# Altium PCB SysUprTestUUConn.PcbDoc
Units mm, origin at the board's own origin, x right, y up, seen from the top; angles counter-clockwise.
Board outline 140 x 110 mm, 4 copper layers (Top Layer, Mid-Layer 1, Mid-Layer 2, Bottom Layer), stack 1.572 mm thick; 15 components, 59 nets, 288 pads, 141 vias.
Unrouted connection lines stored in the file: 33.
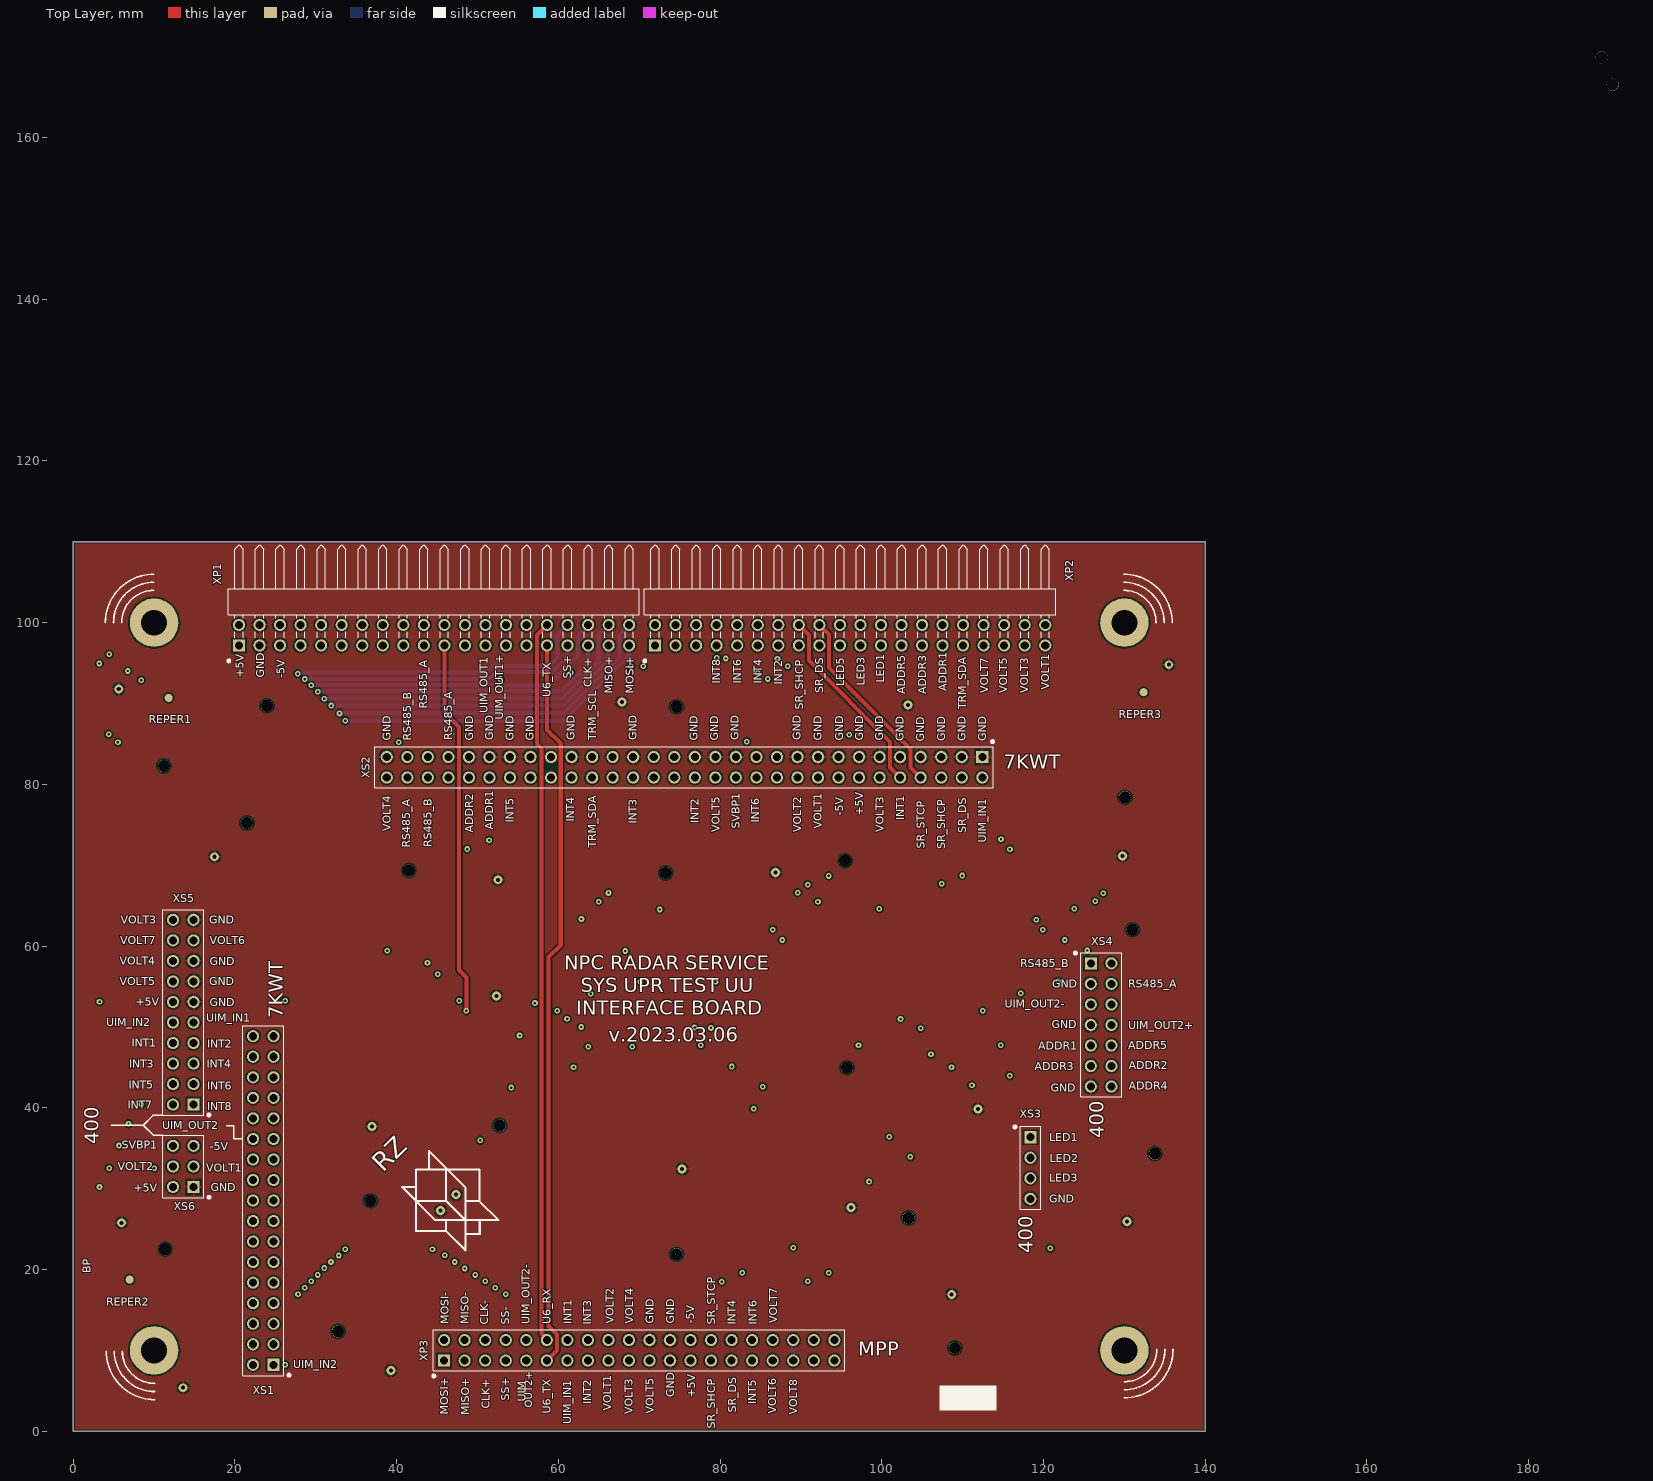
[diagram p0: Top Layer view]
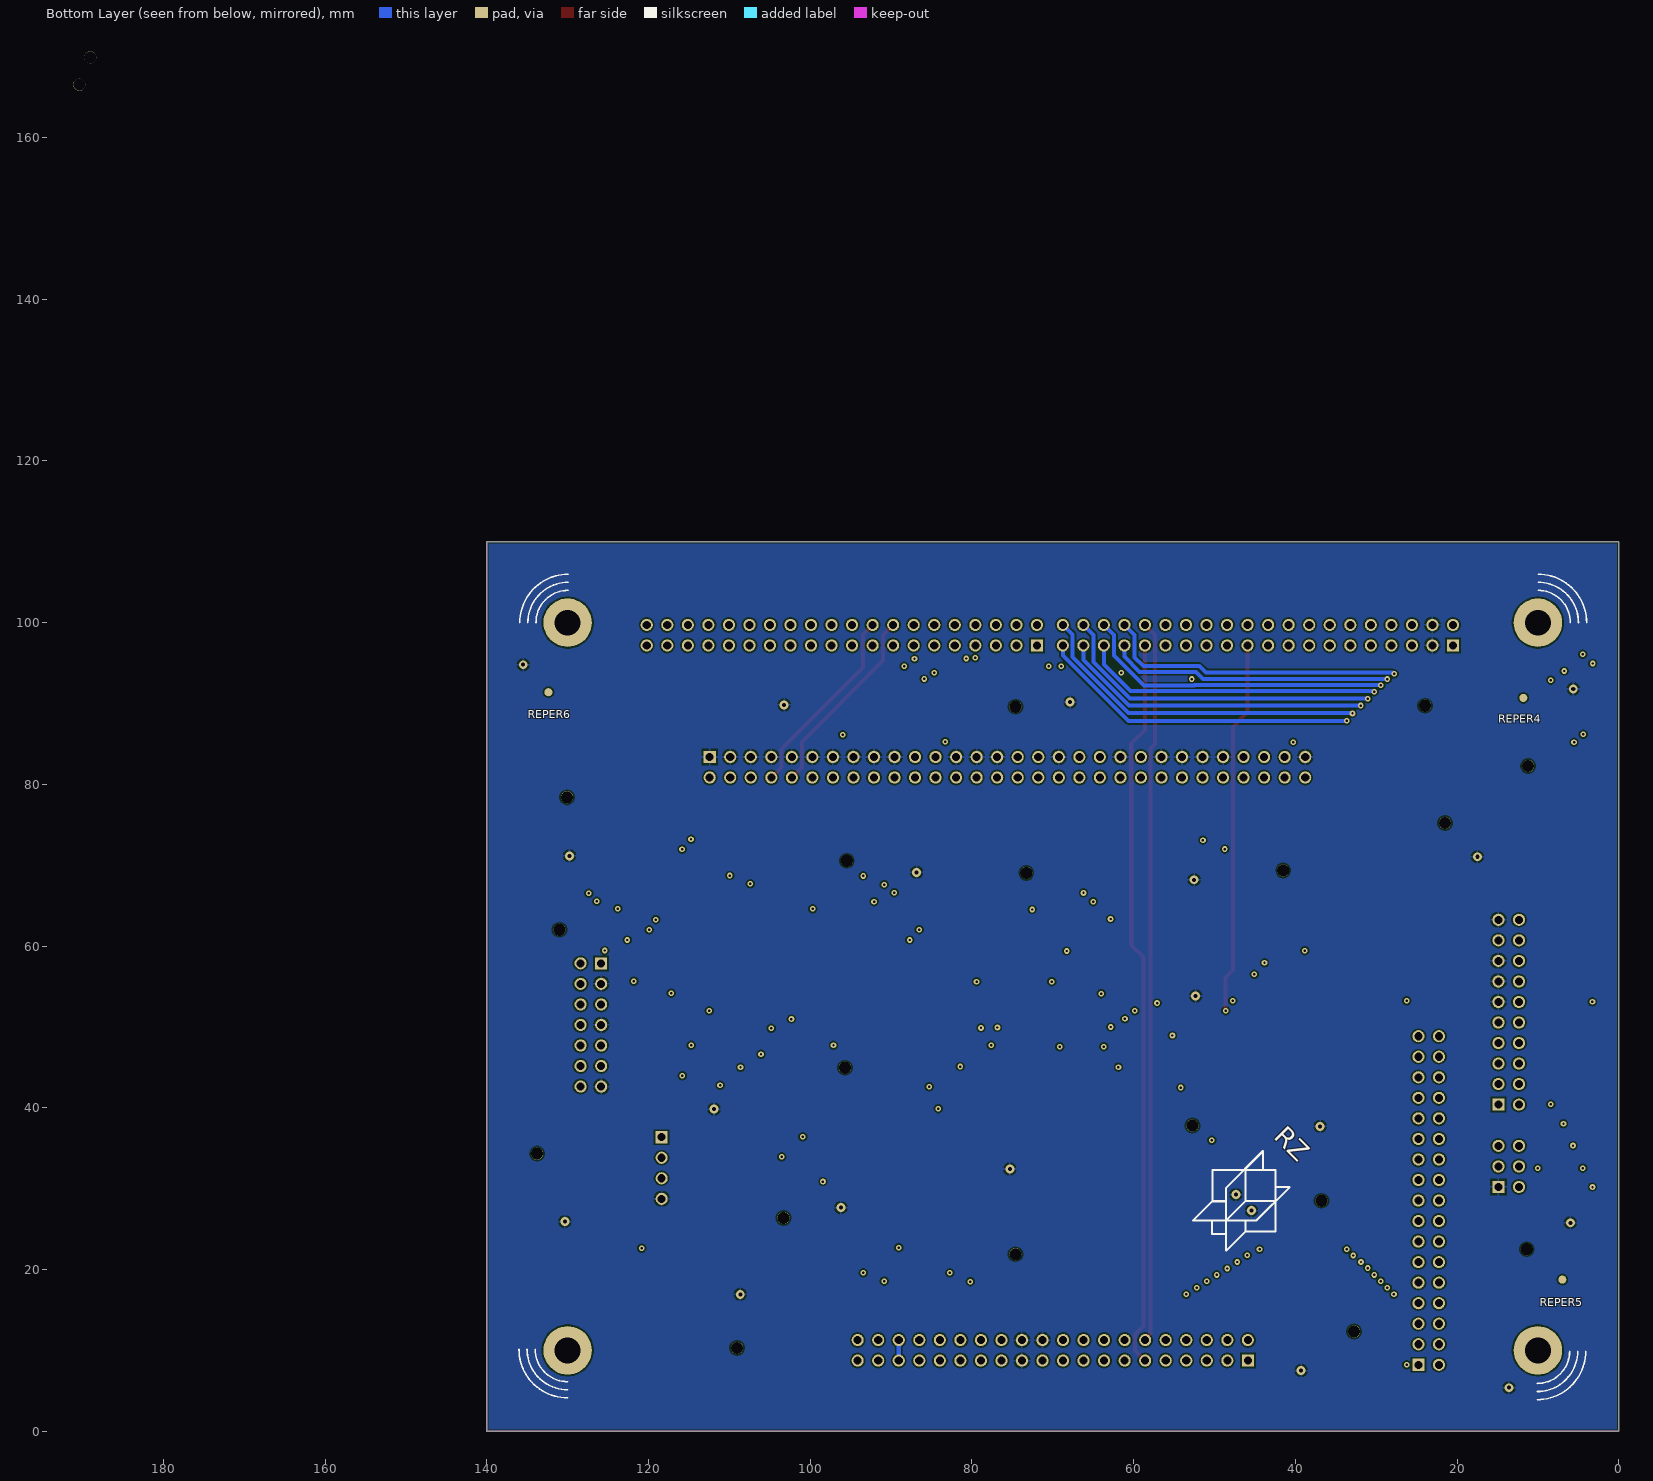
[diagram p1: Bottom Layer view, seen from below]
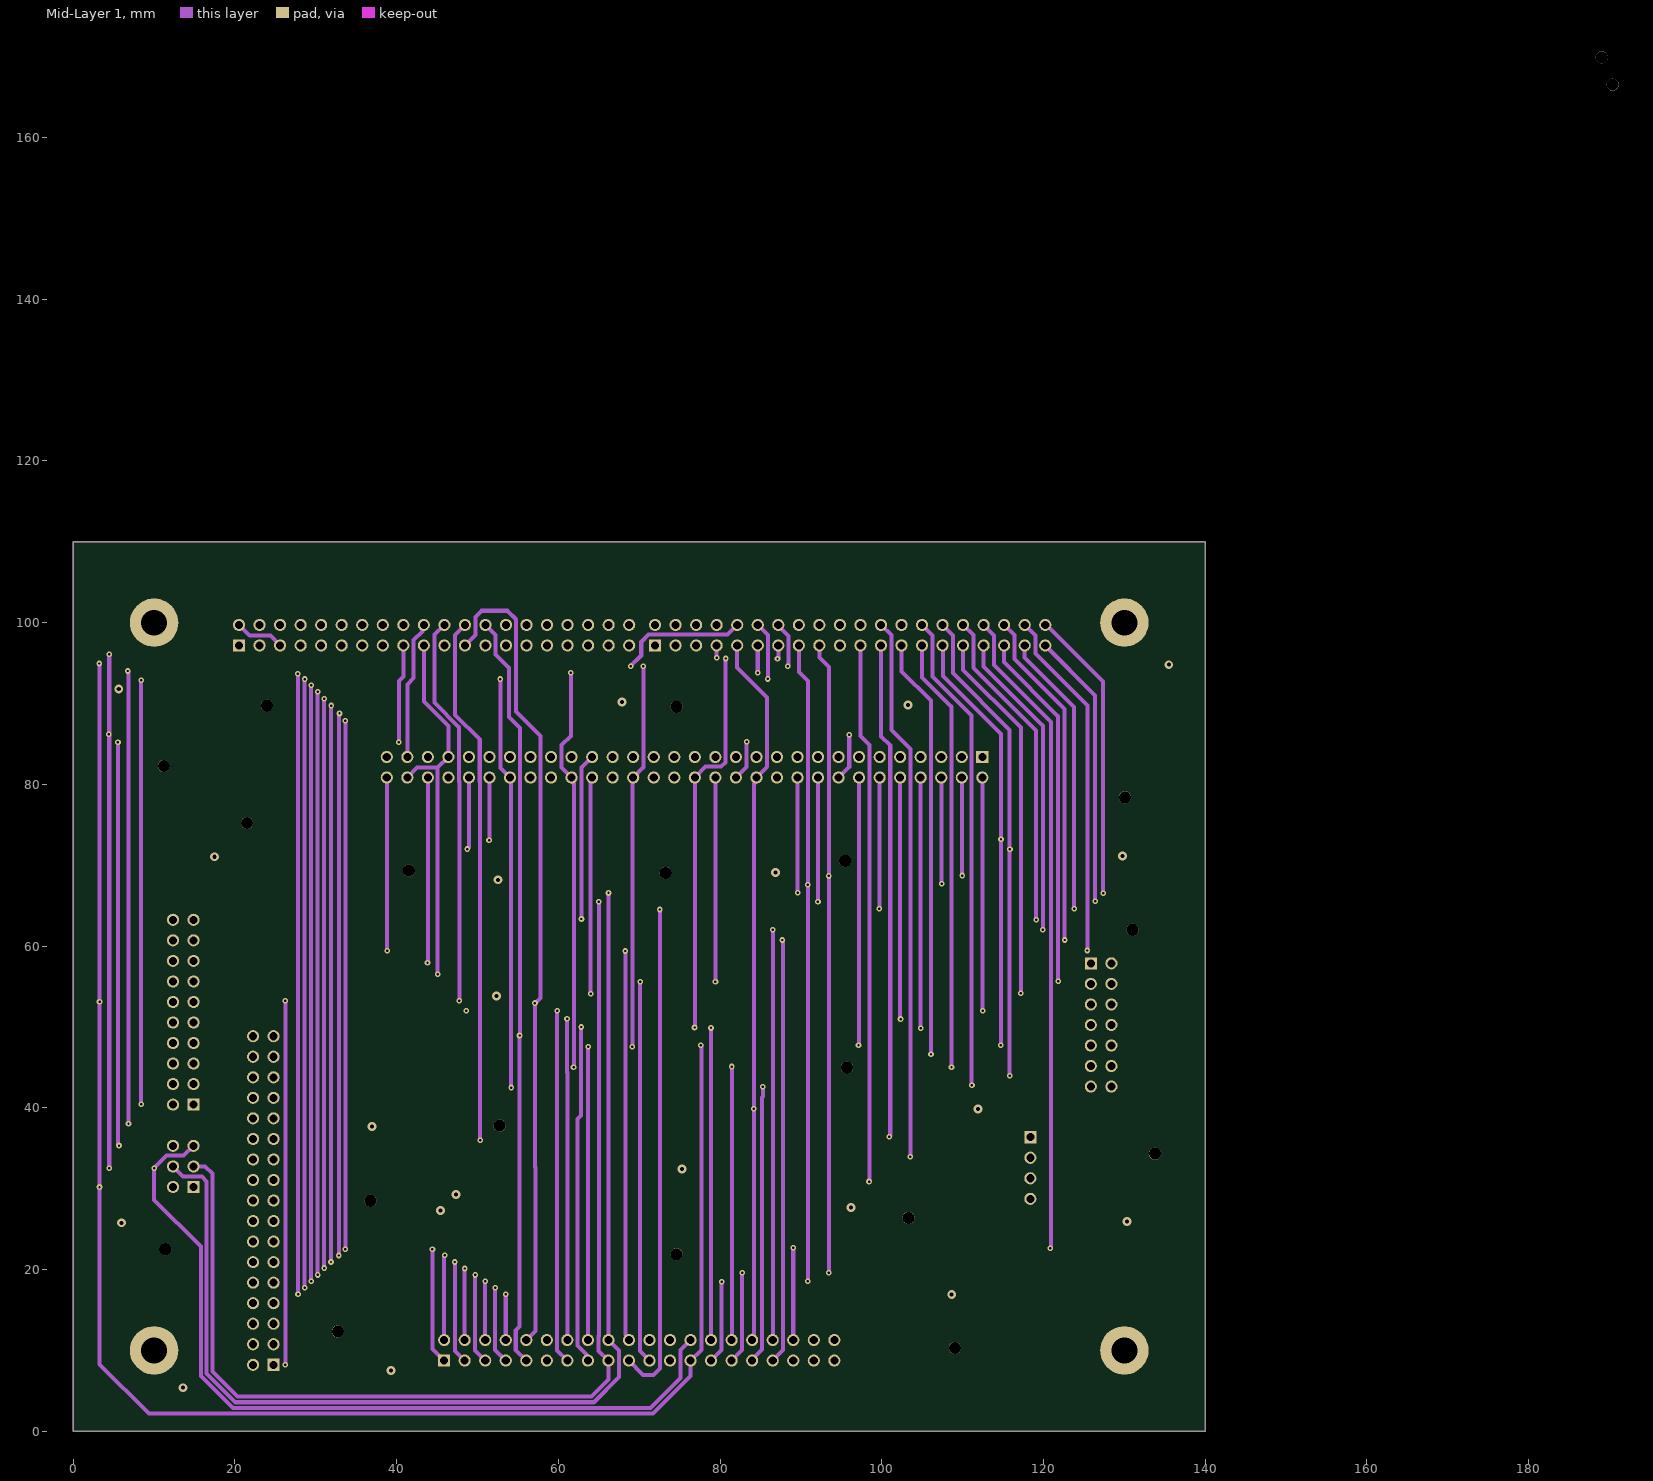
[diagram p2: Mid-Layer 1]
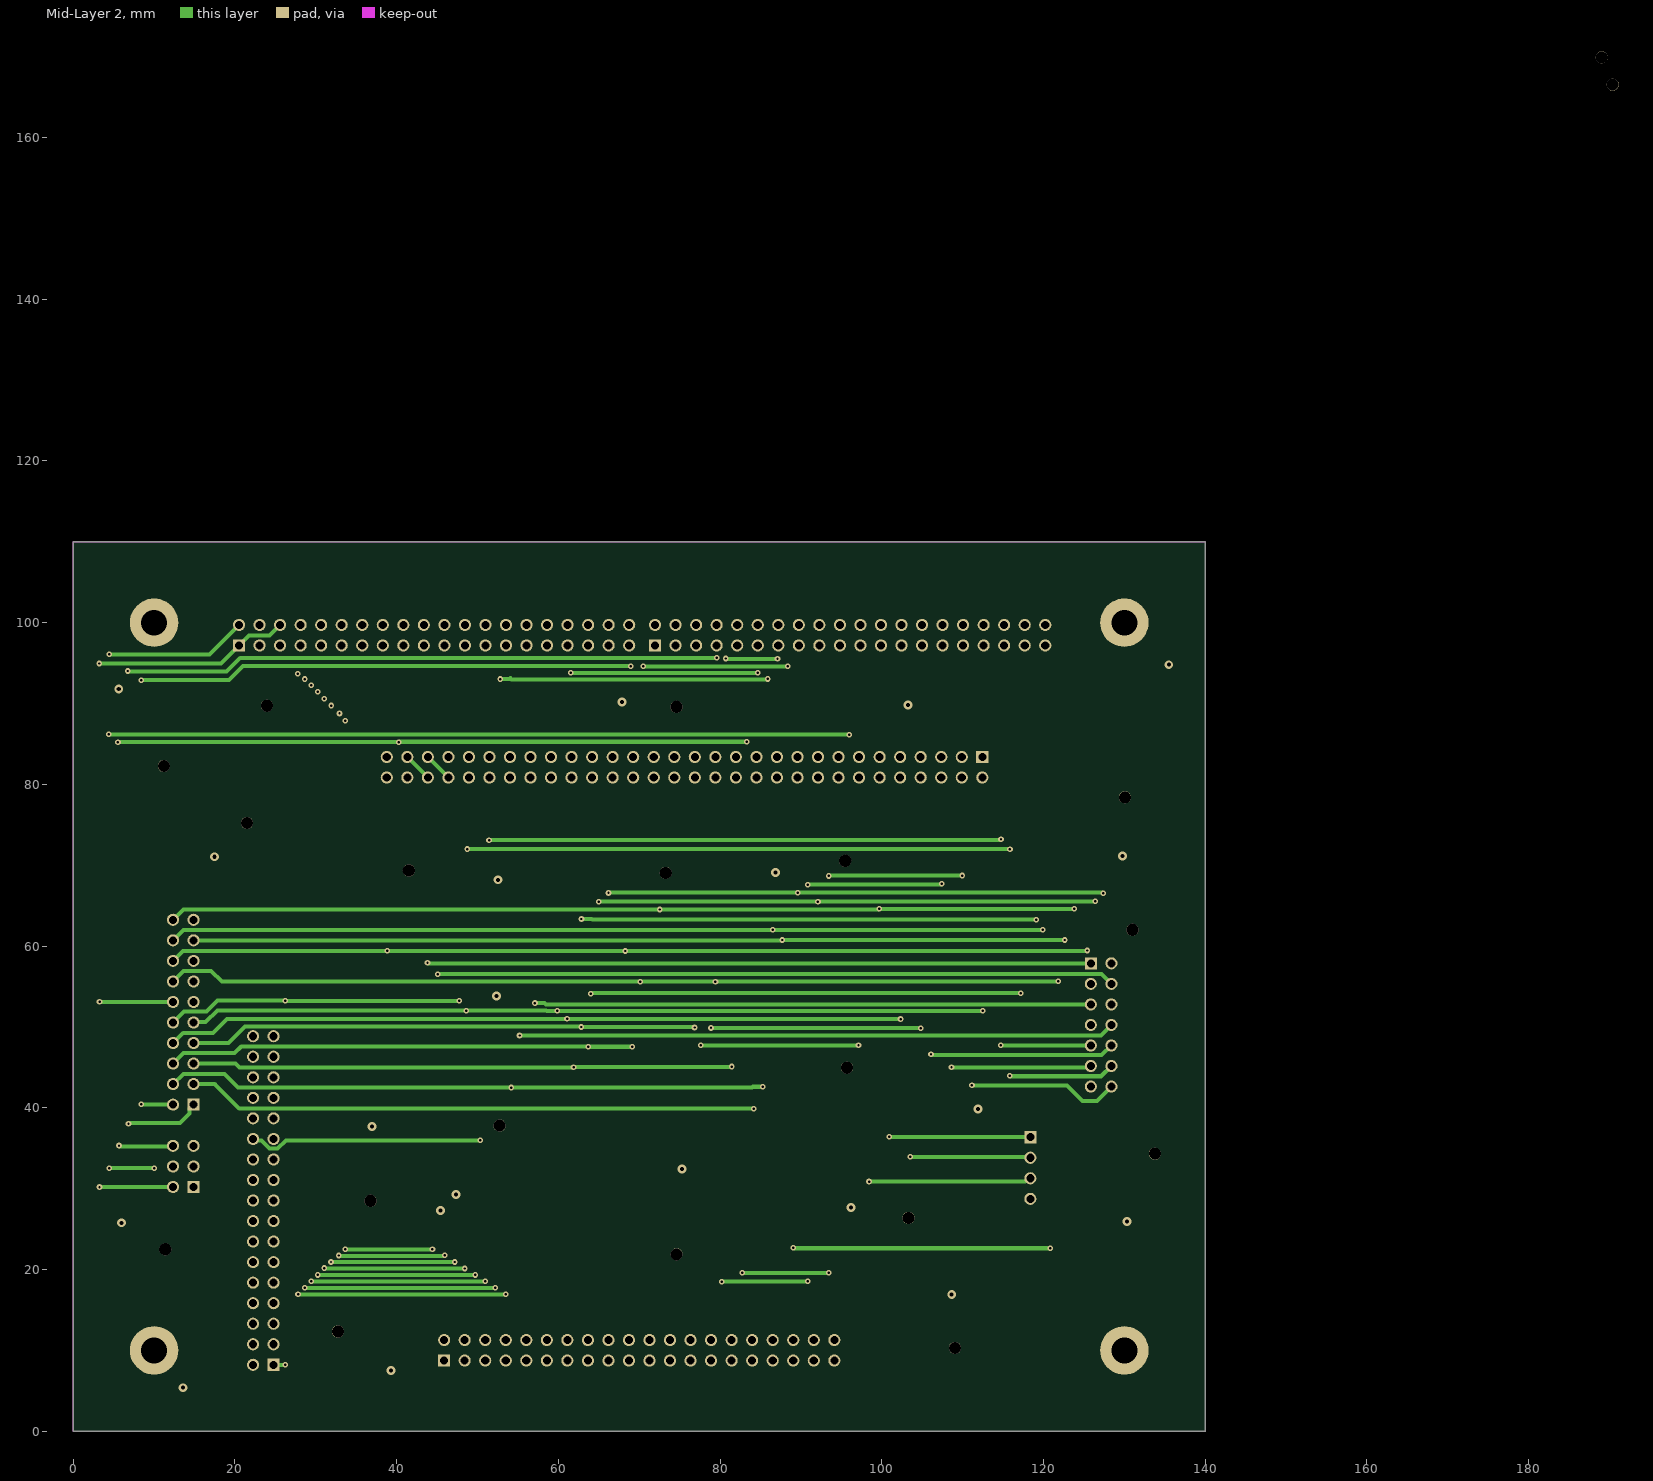
[diagram p3: Mid-Layer 2]

## Layer stack, top to bottom
Top Solder: solder mask 0.0102, Solder Resist, Dk 3.5
Top Layer: signal copper 0.018
Dielectric 1: dielectric 0.5, FR-4, Dk 4.8
Mid-Layer 1: signal copper 0.018
Dielectric2: dielectric 0.5, FR-4, Dk 4.8
Mid-Layer 2: signal copper 0.018
Dielectric3: dielectric 0.5, FR-4, Dk 4.8
Bottom Layer: signal copper 0.018
Bottom Solder: solder mask 0.0102, Solder Resist, Dk 3.5

## Board outline
0,0 140,0 140,110 0,110

## Design rules (kind name [scope] priority, off if disabled: settings)
Clearance "2_Clearance REP" [InComponent('REP1')or InComponent('REP2') or InComponent('REP3') or InComponent('REP4') or InComponent('REP5')or InComponent('REP6') vs InPoly] p1: gap=1 ignorepadtopadclearanceinfootprint=FALSE
Clearance 1Clearance [All] p2: gap=0.2 ignorepadtopadclearanceinfootprint=FALSE
PolygonConnect [All] p1: connectstyle=Relief reliefconductorwidth=0.254 reliefentries=4 polygonreliefangle="90 Angle" airgapwidth=0.254
RoutingVias [All] p1: holewidth=0.3 width=0.7 viastyle="Through Hole" minholewidth=0.2 minwidth=0.5 maxholewidth=0.5 maxwidth=1.1
SolderMaskExpansion [All] p1: expansion=0.102 istentingtop=FALSE
Width [All] p1: maxlimit=1 minlimit=0.3 preferedwidth=0.5
30 further rules are at their usual default settings.

## Classes and differential pairs
component class SysUprTestUUConn: XP1 XP2 XP3 XS1 XS2 XS3 XS4 XS5 XS6

## Components (designator, comment, footprint, x,y, rotation, side; value= is the part's Value field where it differs from the comment)
REPER1 "Comment" REPER1 11.8,90.7 r0 top
REPER2 "Comment" REPER1 6.975,18.75 r0 top
REPER3 "Comment" REPER1 132.375,91.4 r0 top
REPER4 "Comment" REPER1 11.8,90.7 r180 bottom
REPER5 "Comment" REPER1 6.975,18.75 r180 bottom
REPER6 "Comment" REPER1 132.375,91.4 r180 bottom
XP1 "ConnectorP40" PLD-40R 44.63,98.455 r90 top value=40
XP2 "ConnectorP40" PLD-40R 96.09,98.455 r90 top value=40
XP3 "ConnectorP40" PLD-40 70,10 r90 top value=40
XS1 "ConnectorS34" PBD-34 23.505,28.53 r180 top value=34
XS2 "ConnectorS60" PBD-60 75.805,82.12 r270 top value=60
XS3 "ConnectorS4" PBS-4 118.375,32.55 r0 top value=4
XS4 "ConnectorS14" PBD-14 127.13,50.245 r0 top value=14
XS5 "ConnectorS20" PBD-20 13.605,51.82 r180 top value=20
XS6 "ConnectorS6" PBD-6 13.605,32.75 r180 top value=6

## Footprints (in the part's own frame and the unit in brackets; to place one, negate y for a bottom-side part, rotate by r counter-clockwise, add the part's x,y. Pads: shape width x height; smd on the part's side, far side on the other; paste and mask are expansions set on the pad)
PBD-6 [mm]
  rect 1.5x1.5 hole 1 mask+0: 1(-1.27,2.54)
  round 1.5 hole 1 mask+0: 2(1.27,2.54) 3(-1.27,0) 4(1.27,0) 5(-1.27,-2.54) 6(1.27,-2.54)
  silkscreen extent -3.32,-3.88 2.54,3.96, body extent -2.54,-3.81 2.54,3.81, height 8.4
PBD-14 [mm]
  rect 1.5x1.5 hole 1 mask+0: 1(-1.27,7.62)
  round 1.5 hole 1 mask+0: 2(1.27,7.62) 3(-1.27,5.08) 4(1.27,5.08) 5(-1.27,2.54) 6(1.27,2.54) 7(-1.27,0) 8(1.27,0) 9(-1.27,-2.54) 10(1.27,-2.54) 11(-1.27,-5.08) 12(1.27,-5.08) 13(-1.27,-7.62) 14(1.27,-7.62)
  silkscreen extent -3.32,-8.89 2.54,9.04, body extent -2.54,-8.89 2.54,8.89, height 8.4
PBD-20 [mm]
  rect 1.5x1.5 hole 1 mask+0: 1(-1.27,11.43)
  round 1.5 hole 1 mask+0: 2(1.27,11.43) 3(-1.27,8.89) 4(1.27,8.89) 5(-1.27,6.35) 6(1.27,6.35) 7(-1.27,3.81) 8(1.27,3.81) 9(-1.27,1.27) 10(1.27,1.27) 11(-1.27,-1.27) 12(1.27,-1.27) 13(-1.27,-3.81) 14(1.27,-3.81) 15(-1.27,-6.35) 16(1.27,-6.35) 17(-1.27,-8.89) 18(1.27,-8.89) 19(-1.27,-11.43) 20(1.27,-11.43)
  silkscreen extent -3.32,-12.7 2.54,12.85, body extent -2.54,-12.7 2.54,12.7, height 8.4
PBD-34 [mm]
  rect 1.5x1.5 hole 1 mask+0: 1(-1.27,20.32)
  round 1.5 hole 1 mask+0: 2(1.27,20.32) 3(-1.27,17.78) 4(1.27,17.78) 5(-1.27,15.24) 6(1.27,15.24) 7(-1.27,12.7) 8(1.27,12.7) 9(-1.27,10.16) 10(1.27,10.16) 11(-1.27,7.62) 12(1.27,7.62) 13(-1.27,5.08) 14(1.27,5.08) 15(-1.27,2.54) 16(1.27,2.54) 17(-1.27,0) 18(1.27,0) 19(-1.27,-2.54) 20(1.27,-2.54) 21(-1.27,-5.08) 22(1.27,-5.08) 23(-1.27,-7.62) 24(1.27,-7.62) 25(-1.27,-10.16) 26(1.27,-10.16) 27(-1.27,-12.7) 28(1.27,-12.7) 29(-1.27,-15.24) 30(1.27,-15.24) 31(-1.27,-17.78) 32(1.27,-17.78) 33(-1.27,-20.32) 34(1.27,-20.32)
  silkscreen extent -3.32,-21.59 2.54,21.74, body extent -2.54,-21.59 2.54,21.59, height 8.4
PBD-60 [mm]
  rect 1.5x1.5 hole 1 mask+0: 1(-1.27,36.63)
  round 1.5 hole 1 mask+0: 2(1.27,36.63) 3(-1.27,34.09) 4(1.27,34.09) 5(-1.27,31.55) 6(1.27,31.55) 7(-1.27,29.01) 8(1.27,29.01) 9(-1.27,26.47) 10(1.27,26.47) 11(-1.27,23.93) 12(1.27,23.93) 13(-1.27,21.39) 14(1.27,21.39) 15(-1.27,18.85) 16(1.27,18.85) 17(-1.27,16.31) 18(1.27,16.31) 19(-1.27,13.77) 20(1.27,13.77) 21(-1.27,11.23) 22(1.27,11.23) 23(-1.27,8.69) 24(1.27,8.69) 25(-1.27,6.15) 26(1.27,6.15) 27(-1.27,3.61) 28(1.27,3.61) 29(-1.27,1.07) 30(1.27,1.07) 31(-1.27,-1.47) 32(1.27,-1.47) 33(-1.27,-4.01) 34(1.27,-4.01) 35(-1.27,-6.55) 36(1.27,-6.55) 37(-1.27,-9.09) 38(1.27,-9.09) 39(-1.27,-11.63) 40(1.27,-11.63) 41(-1.27,-14.17) 42(1.27,-14.17) 43(-1.27,-16.71) 44(1.27,-16.71) 45(-1.27,-19.25) 46(1.27,-19.25) 47(-1.27,-21.79) 48(1.27,-21.79) 49(-1.27,-24.33) 50(1.27,-24.33) 51(-1.27,-26.87) 52(1.27,-26.87) 53(-1.27,-29.41) 54(1.27,-29.41) 55(-1.27,-31.95) 56(1.27,-31.95) 57(-1.27,-34.49) 58(1.27,-34.49) 59(-1.27,-37.03) 60(1.27,-37.03)
  silkscreen extent -3.32,-38.5 2.54,38.05, body extent -2.54,-38.3 2.54,37.9, height 8.4
PBS-4 [mm]
  rect 1.5x1.5 hole 1: 1(0,3.81)
  round 1.5 hole 1: 2(0,1.27) 3(0,-1.27) 4(0,-3.81)
  silkscreen extent -2.05,-5.08 1.27,5.23, body extent -1.27,-5.07 1.27,5.09, height 8.5
PLD-40 [mm]
  rect 1.5x1.5 hole 1 mask+0: 1(-1.27,24.13)
  round 1.5 hole 1 mask+0: 2(1.27,24.13) 3(-1.27,21.59) 4(1.27,21.59) 5(-1.27,19.05) 6(1.27,19.05) 7(-1.27,16.51) 8(1.27,16.51) 9(-1.27,13.97) 10(1.27,13.97) 11(-1.27,11.43) 12(1.27,11.43) 13(-1.27,8.89) 14(1.27,8.89) 15(-1.27,6.35) 16(1.27,6.35) 17(-1.27,3.81) 18(1.27,3.81) 19(-1.27,1.27) 20(1.27,1.27) 21(-1.27,-1.27) 22(1.27,-1.27) 23(-1.27,-3.81) 24(1.27,-3.81) 25(-1.27,-6.35) 26(1.27,-6.35) 27(-1.27,-8.89) 28(1.27,-8.89) 29(-1.27,-11.43) 30(1.27,-11.43) 31(-1.27,-13.97) 32(1.27,-13.97) 33(-1.27,-16.51) 34(1.27,-16.51) 35(-1.27,-19.05) 36(1.27,-19.05) 37(-1.27,-21.59) 38(1.27,-21.59) 39(-1.27,-24.13) 40(1.27,-24.13)
  silkscreen extent -3.32,-25.4 2.54,25.55, body extent -2.5,-25.4 2.5,25.4, height 8.5
PLD-40R [mm]
  rect 1.5x1.5 hole 1 mask+0: 1(-1.27,24.13)
  round 1.5 hole 1 mask+0: 2(1.27,24.13) 3(-1.27,21.59) 4(1.27,21.59) 5(-1.27,19.05) 6(1.27,19.05) 7(-1.27,16.51) 8(1.27,16.51) 9(-1.27,13.97) 10(1.27,13.97) 11(-1.27,11.43) 12(1.27,11.43) 13(-1.27,8.89) 14(1.27,8.89) 15(-1.27,6.35) 16(1.27,6.35) 17(-1.27,3.81) 18(1.27,3.81) 19(-1.27,1.27) 20(1.27,1.27) 21(-1.27,-1.27) 22(1.27,-1.27) 23(-1.27,-3.81) 24(1.27,-3.81) 25(-1.27,-6.35) 26(1.27,-6.35) 27(-1.27,-8.89) 28(1.27,-8.89) 29(-1.27,-11.43) 30(1.27,-11.43) 31(-1.27,-13.97) 32(1.27,-13.97) 33(-1.27,-16.51) 34(1.27,-16.51) 35(-1.27,-19.05) 36(1.27,-19.05) 37(-1.27,-21.59) 38(1.27,-21.59) 39(-1.27,-24.13) 40(1.27,-24.13)
  silkscreen extent -3.32,-25.4 11.16,25.55, body extent -1.61,-25.4 11.43,25.4, height 5.15
REPER1 [mm] "Diameter = 1mm"
  round 1 smd mask+0.5: REP(0,0)

## Part data
REPER1 REPER2 REPER3 REPER4 REPER5 REPER6: library part 27
XP1 XP2: library part 338, CurrentLimit=1, Manufacturer="АО «Карачевский завод Электродеталь»", ManufacturerTU=РЮМК.430420.011ТУ, Package=PLD-R, PartNumber="Вилка СНП346-40ВП32-2-В", PowerLimit=250, TemperatureRange="от минус 60 до 85", Alternative=PLD-40R, Alternative2="СНП346-40ВП32-2 РЮМК.430420.019ТУ", CardKRR=75, ComponentLink1Description=СНП346, ComponentLink1URL=\\192.168.0.101\U_Base\PDF\X\СНП346.pdf, Conn08Name=Not_Used, DataSheet=#\\192.168.0.101\U_Base\PDF\X\СНП346.pdf#, Group=Соединители, HelpURL=\\192.168.0.101\U_Base\PDF\X\СНП346.pdf, key=338, Mass=0,0024, MilitaryControl=ВП, Modify=22.01.2019, MountType=РМ, Name=СНП346-40ВП32-2-В, SolderName=SNP346-40VP32-2, ViewControl="В, 10%", VoltageLimit=250, X_SORT_1=700, X_SORT_2=600, X_SORT_3=1
  XP1: Conn01Name=+5V_PCB, Conn02Name=-5V_PCB, Conn03Name=GND_PCB, Conn04Name=GND_PCB, Conn05Name=-5V_PCB, Conn06Name=+5V_PCB, Conn07Name=Not_Used, Conn09Name=Not_Used, Conn10Name=Not_Used, Conn11Name=Not_Used, Conn12Name=Not_Used, Conn13Name=Not_Used, Conn14Name=Not_Used, Conn15Name=Not_Used, Conn16Name=Not_Used, Conn17Name=SVBP1_PCB, Conn18Name=SVBP2_PCB, Conn19Name=RS485_A_PCB, Conn20Name=RS485_B_PCB, Conn21Name=UIM_IN1_PCB, Conn22Name=UIM_IN2_PCB, Conn23Name=UIM_OUT2_PCB-, Conn24Name=UIM_OUT2_PCB, Conn25Name=UIM_OUT1_PCB, Conn26Name=UIM_OUT2_PCB+, Conn27Name=UIM_OUT1_PCB+, Conn28Name=UIM_OUT1_PCB-, Conn29Name=Not_Used, Conn30Name=Not_Used, Conn31Name=UART6_TX, Conn32Name=UART6_RX, Conn33Name=SPI_SS_PCB+, Conn34Name=SPI_SS_PCB-, Conn35Name=SPI_CLK_PCB+, Conn36Name=SPI_CLK_PCB-, Conn37Name=SPI_MISO_PCB+, Conn38Name=SPI_MISO_PCB-, Conn39Name=SPI_MOSI_PCB+, Conn40Name=SPI_MOSI_PCB-
  XP2: Conn01Name=Not_Used, Conn02Name=Not_Used, Conn03Name=Not_Used, Conn04Name=Not_Used, Conn05Name=Not_Used, Conn06Name=Not_Used, Conn07Name=INT8_PCB, Conn09Name=INT6_PCB, Conn10Name=INT7_PCB, Conn11Name=INT4_PCB, Conn12Name=INT5_PCB, Conn13Name=INT2_PCB, Conn14Name=INT3_PCB, Conn15Name=SR_SHCP_PCB, Conn16Name=INT1_PCB, Conn17Name=SR_DS_PCB, Conn18Name=SR_STCP_PCB, Conn19Name=LED5_PCB, Conn20Name=LED6_PCB, Conn21Name=LED3_PCB, Conn22Name=LED4_PCB, Conn23Name=LED1_PCB, Conn24Name=LED2_PCB, Conn25Name=ADDR5_PCB, Conn26Name=ADDR6_PCB, Conn27Name=ADDR3_PCB, Conn28Name=ADDR4_PCB, Conn29Name=ADDR1_PCB, Conn30Name=ADDR2_PCB, Conn31Name=TRM_SDA_PCB, Conn32Name=TRM_SCL_PCB, Conn33Name=VOLT7_PCB, Conn34Name=VOLT8_PCB, Conn35Name=VOLT5_PCB, Conn36Name=VOLT6_PCB, Conn37Name=VOLT3_PCB, Conn38Name=VOLT4_PCB, Conn39Name=VOLT1_PCB, Conn40Name=VOLT2_PCB
XP3: library part 60, CurrentLimit=1, Manufacturer="АО «Карачевский завод Электродеталь»", ManufacturerTU=РЮМК.430420.011ТУ, Package=PLD, PartNumber="Вилка СНП346-40ВП22-2-В", PowerLimit=250, TemperatureRange="от минус 60 до 85", Alternative=PLD-40, Alternative2="СНП346-40ВП22-2 РЮМК.430420.019ТУ", CardKRR=75, ComponentLink1Description=СНП346, ComponentLink1URL=\\192.168.0.101\U_Base\PDF\X\СНП346.pdf, Conn01Name=MOSI+, Conn02Name=MOSI-, Conn03Name=MISO+, Conn04Name=MISO-, Conn05Name=SCK+, Conn06Name=SCK-, Conn07Name=SS+, Conn08Name=SS-, Conn09Name=SET+, Conn10Name=SET-, Conn11Name=U2_RX, Conn12Name=U2_TX, Conn13Name=TRANSMITER1, Conn14Name=TRANSMITER2, Conn15Name=TRANSMITER3, Conn16Name=TRANSMITER4, Conn17Name=VOLT1, Conn18Name=VOLT2, Conn19Name=VOLT3, Conn20Name=VOLT4, Conn21Name=VOLT5, Conn22Name=GND, Conn23Name=GND, Conn24Name=GND, Conn25Name=+5V, Conn26Name=-5V, Conn27Name=CLK, Conn28Name=LE1, Conn29Name=DS1, Conn30Name=DS2, Conn31Name=DS3, Conn32Name=DS4, Conn33Name=REFL1, Conn34Name=REFL2, Conn35Name=REFL3, Conn36Name=REFL4, DataSheet=#\\192.168.0.101\U_Base\PDF\X\СНП346.pdf#, Group=Соединители, HelpURL=\\192.168.0.101\U_Base\PDF\X\СНП346.pdf, key=60, Mass=0,0024, MilitaryControl=ВП, Modify=19.09.2018, MountType=РМ, Name=СНП346-40ВП22-2-В, SolderName=SNP346-40VP22-2, ViewControl="В, 10%", VoltageLimit=250, X_SORT_1=700, X_SORT_2=600, X_SORT_3=1
XS1: library part 117, CurrentLimit=1, Manufacturer="АО «Карачевский завод Электродеталь»", ManufacturerTU=РЮМК.430420.011ТУ, Package=PBD, PartNumber="Розетка СНП346-34РП22-2-В", PowerLimit=250, TemperatureRange="от минус 60 до 85", Alternative=PBD-34, Alternative2="СНП346-34РП22-2 РЮМК.430420.019ТУ", CardKRR=75, ComponentLink1Description=СНП346, ComponentLink1URL=\\192.168.0.101\U_Base\PDF\X\СНП346.pdf, Conn01Name=ENVELOP, Conn24Name=UIM_IN, Conn35Name=35, Conn36Name=36, Conn37Name=37, Conn38Name=38, Conn39Name=39, Conn40Name=40, DataSheet=#\\192.168.0.101\U_Base\PDF\X\СНП346.pdf#, Group=Соединители, HelpURL=\\192.168.0.101\U_Base\PDF\X\СНП346.pdf, key=117, Mass=0,00306, MilitaryControl=ВП, Modify=19.09.2018, MountType=РМ, Name=СНП346-34РП22-2-В, SolderName=SNP346-34RP22-2, ViewControl="В, 10%", VoltageLimit=250, X_SORT_1=700, X_SORT_2=600, X_SORT_3=1
XS2: library part 455, CurrentLimit=1, Manufacturer="АО «Карачевский завод Электродеталь»", ManufacturerTU=РЮМК.430420.011ТУ, Package=PBD, PartNumber="Розетка СНП346-60РП22-2-В", PowerLimit=250, TemperatureRange="от минус 60 до 85", Alternative=PBD-60, Alternative2="СНП346-60РП22-2 РЮМК.430420.019ТУ", CardKRR=75, ComponentLink1Description=СНП346, ComponentLink1URL=\\192.168.0.101\U_Base\PDF\X\СНП346.pdf, Conn01Name=GND, Conn02Name=UIM_OUT, Conn03Name=GND, Conn04Name=SR_DS, Conn05Name=GND, Conn06Name=SR_CLK, Conn07Name=GND, Conn08Name=SR_EN1, Conn09Name=GND, Conn10Name=SR_EN2, Conn11Name=GND, Conn12Name=P_IN, Conn13Name=GND_A, Conn14Name=+5V_I, Conn15Name=GND_A, Conn16Name=-5V_I, Conn17Name=GND, Conn18Name=VOLT1, Conn19Name=GND, Conn20Name=VOLT2, Conn21Name=SCL_EXT, Conn22Name=SDA_EXT, Conn24Name=1-WIRE, Conn25Name=GND, Conn26Name=SVBP, Conn27Name=GND, Conn28Name=P_REF, Conn29Name=GND, Conn30Name=UIM_OUT, Conn31Name=SCL_EXT1, Conn32Name=SDA_EXT1, Conn33Name=SCL_EXT2, Conn34Name=SDA_EXT2, Conn35Name=GND, Conn36Name=UIM_OUT, Conn37Name=SCL_EXT3, Conn38Name=SDA_EXT3, Conn39Name=SCL_EXT4, Conn40Name=SDA_EXT4, Conn41Name=GND, Conn42Name=UIM_OUT, Conn43Name=TCK/SWCLK, Conn44Name=TMS/SDIO, Conn45Name=GND, Conn46Name=+3.3В, Conn47Name=GND, Conn48Name=UIM_OUT, Conn49Name=GND, Conn50Name=ADDR0, Conn51Name=GND, Conn52Name=ADDR1, Conn53Name=RS485_A, Conn54Name=Screen, Conn55Name=Screen, Conn56Name=RS485_B, Conn57Name=RS485_B, Conn58Name=RS485_A, Conn59Name=GND_A, Conn60Name=P_OUT, DataSheet=#\\192.168.0.101\U_Base\PDF\X\СНП346.pdf#, Group=Соединители, HelpURL=\\192.168.0.101\U_Base\PDF\X\СНП346.pdf, key=455, Mass=0,0036, MilitaryControl=ВП, Modify=07.02.2023, MountType=РМ, Name=СНП346-60РП22-2-В, SolderName=SNP346-60RP22-2, ViewControl="В, 10%", VoltageLimit=250, X_SORT_1=700, X_SORT_2=600, X_SORT_3=1
XS3: library part 64, CurrentLimit=1, Manufacturer="АО «Карачевский завод Электродеталь»", ManufacturerTU=РЮМК.430420.011ТУ, Package=PBS, PartNumber="Розетка СНП346-4РП22-1-В", PowerLimit=250, TemperatureRange="от минус 60 до 85", Alternative=PBS-4, Alternative2="СНП346-4РП22-1 РЮМК.430420.019ТУ", CardKRR=75, ComponentLink1Description=СНП346, ComponentLink1URL=\\192.168.0.101\U_Base\PDF\X\СНП346.pdf, Conn01Name=LED_R, Conn02Name=LED_G, Conn03Name=LED_B, Conn04Name=GND, Conn05Name=5, Conn06Name=6, Conn07Name=7, Conn08Name=8, Conn09Name=9, Conn10Name=10, Conn11Name=11, Conn12Name=12, Conn13Name=13, Conn14Name=14, Conn15Name=15, Conn16Name=16, Conn17Name=17, Conn18Name=18, Conn19Name=19, Conn20Name=20, Conn21Name=21, Conn22Name=22, Conn23Name=23, Conn24Name=24, Conn25Name=25, Conn26Name=26, Conn27Name=27, Conn28Name=28, Conn29Name=29, Conn30Name=30, Conn31Name=31, Conn32Name=32, Conn33Name=33, Conn34Name=34, Conn35Name=35, Conn36Name=36, Conn37Name=37, Conn38Name=38, Conn39Name=39, Conn40Name=40, DataSheet=#\\192.168.0.101\U_Base\PDF\X\СНП346.pdf#, Group=Соединители, HelpURL=\\192.168.0.101\U_Base\PDF\X\СНП346.pdf, key=64, Mass=0,0004, MilitaryControl=ВП, Modify=19.09.2018, MountType=РМ, Name=СНП346-4РП22-1-В, SolderName=SNP346-4RP22-1, ViewControl="В, 10%", VoltageLimit=250, X_SORT_1=700, X_SORT_2=600, X_SORT_3=1
XS4: library part 107, CurrentLimit=1, Manufacturer="АО «Карачевский завод Электродеталь»", ManufacturerTU=РЮМК.430420.011ТУ, Package=PBD, PartNumber="Розетка СНП346-14РП22-2-В", PowerLimit=250, TemperatureRange="от минус 60 до 85", Alternative=PBD-14, Alternative2="СНП346-14РП22-2 РЮМК.430420.019ТУ", CardKRR=75, ComponentLink1Description=СНП346, ComponentLink1URL=\\192.168.0.101\U_Base\PDF\X\СНП346.pdf, Conn01Name=RS485_B, Conn03Name=GND, Conn04Name=RS485_A, Conn05Name=UIM_MI, Conn07Name=GND, Conn08Name=UIM_PL, Conn09Name=ADDR0, Conn10Name=ADDR4, Conn11Name=ADDR2, Conn12Name=ADDR1, Conn13Name=GND, Conn14Name=ADDR3, Conn15Name=15, Conn16Name=16, Conn17Name=17, Conn18Name=18, Conn19Name=19, Conn20Name=20, Conn21Name=21, Conn22Name=22, Conn23Name=23, Conn24Name=24, Conn25Name=25, Conn26Name=26, Conn27Name=27, Conn28Name=28, Conn29Name=29, Conn30Name=30, Conn31Name=31, Conn32Name=32, Conn33Name=33, Conn34Name=34, Conn35Name=35, Conn36Name=36, Conn37Name=37, Conn38Name=38, Conn39Name=39, Conn40Name=40, DataSheet=#\\192.168.0.101\U_Base\PDF\X\СНП346.pdf#, Group=Соединители, HelpURL=\\192.168.0.101\U_Base\PDF\X\СНП346.pdf, key=107, Mass=0,00126, MilitaryControl=ВП, Modify=19.09.2018, MountType=РМ, Name=СНП346-14РП22-2-В, SolderName=SNP346-14RP22-2, ViewControl="В, 10%", VoltageLimit=250, X_SORT_1=700, X_SORT_2=600, X_SORT_3=1
XS5: library part 110, CurrentLimit=1, Manufacturer="АО «Карачевский завод Электродеталь»", ManufacturerTU=РЮМК.430420.011ТУ, Package=PBD, PartNumber="Розетка СНП346-20РП22-2-В", PowerLimit=250, TemperatureRange="от минус 60 до 85", Alternative=PBD-20, Alternative2="СНП346-20РП22-2 РЮМК.430420.019ТУ", CardKRR=75, ComponentLink1Description=СНП346, ComponentLink1URL=\\192.168.0.101\U_Base\PDF\X\СНП346.pdf, Conn01Name=PH1, Conn02Name=PH0, Conn03Name=PH3, Conn04Name=PH2, Conn05Name=PH5, Conn06Name=PH4, Conn07Name=Tc, Conn08Name=E0, Conn09Name=UIM_OUT1, Conn10Name=UIM_OUT2, Conn11Name=GND, Conn12Name=+5V_I, Conn13Name=GND, Conn14Name=TERMO, Conn15Name=GND, Conn16Name=P_OUT, Conn17Name=PREFL_2, Conn18Name=PREFL_1, Conn19Name=GND, Conn20Name=P_IN, Conn21Name=21, Conn22Name=22, Conn23Name=23, Conn24Name=24, Conn25Name=25, Conn26Name=26, Conn27Name=27, Conn28Name=28, Conn29Name=29, Conn30Name=30, Conn31Name=31, Conn32Name=32, Conn33Name=33, Conn34Name=34, Conn35Name=35, Conn36Name=36, Conn37Name=37, Conn38Name=38, Conn39Name=39, Conn40Name=40, DataSheet=#\\192.168.0.101\U_Base\PDF\X\СНП346.pdf#, Group=Соединители, HelpURL=\\192.168.0.101\U_Base\PDF\X\СНП346.pdf, key=110, Mass=0,0018, MilitaryControl=ВП, Modify=19.09.2018, MountType=РМ, Name=СНП346-20РП22-2-В, SolderName=SNP346-20RP22-2, ViewControl="В, 10%", VoltageLimit=250, X_SORT_1=700, X_SORT_2=600, X_SORT_3=1
XS6: library part 103, CurrentLimit=1, Manufacturer="АО «Карачевский завод Электродеталь»", ManufacturerTU=РЮМК.430420.011ТУ, Package=PBD, PartNumber="Розетка СНП346-6РП22-2-В", PowerLimit=250, TemperatureRange="от минус 60 до 85", Alternative=PBD-6, Alternative2="СНП346-6РП22-2 РЮМК.430420.019ТУ", CardKRR=75, ComponentLink1Description=СНП346, ComponentLink1URL=\\192.168.0.101\U_Base\PDF\X\СНП346.pdf, Conn01Name=GND, Conn02Name=+5V_I, Conn03Name=VOLT, Conn04Name=CURR, Conn05Name=-5V_I, Conn06Name=SVBP, Conn07Name=7, Conn08Name=8, Conn09Name=9, Conn10Name=10, Conn11Name=11, Conn12Name=12, Conn13Name=13, Conn14Name=14, Conn15Name=15, Conn16Name=16, Conn17Name=17, Conn18Name=18, Conn19Name=19, Conn20Name=20, Conn21Name=21, Conn22Name=22, Conn23Name=23, Conn24Name=24, Conn25Name=25, Conn26Name=26, Conn27Name=27, Conn28Name=28, Conn29Name=29, Conn30Name=30, Conn31Name=31, Conn32Name=32, Conn33Name=33, Conn34Name=34, Conn35Name=35, Conn36Name=36, Conn37Name=37, Conn38Name=38, Conn39Name=39, Conn40Name=40, DataSheet=#\\192.168.0.101\U_Base\PDF\X\СНП346.pdf#, Group=Соединители, HelpURL=\\192.168.0.101\U_Base\PDF\X\СНП346.pdf, key=103, Mass=0,00054, MilitaryControl=ВП, Modify=19.09.2018, MountType=РМ, Name=СНП346-6РП22-2-В, SolderName=SNP346-6RP22-2, ViewControl="В, 10%", VoltageLimit=250, X_SORT_1=700, X_SORT_2=600, X_SORT_3=1

## Free pads (board coordinates)
  round 6 hole 3.2 unplated: 0(10,10) 0(10,100) 0(130,10) 0(130,100)
  round 1.5 hole 1.5 unplated: 0(11.2,82.275) 0(11.375,22.5) 0(21.475,75.225) 0(23.95,89.725) 0(32.725,12.325) 0(36.775,28.5) 0(41.5,69.35) 0(52.725,37.8) 0(73.275,69.05) 0(74.6,89.6) 0(74.625,21.875) 0(95.475,70.55) 0(95.7,44.95) 0(103.3,26.375) 0(109.05,10.3) 0(130.075,78.4) 0(131,62.025) 0(133.775,34.325) 0(189.05,169.925) 0(190.4,166.55)

## Via types
v1: diameter 0.7, hole 0.3, Top Layer to Bottom Layer, tented both sides, 121 vias
v2: diameter 1.1, hole 0.5, Top Layer to Bottom Layer, tented both sides, 20 vias

## Nets (pads, with @x,y where several pads share a name; then routed paths per layer and width w, separated by ;. In a path a pad name is that pad's centre, name@x,y a point inside that pad or via, vN(x,y) a via of type N, cw(c..) or ccw(c..) an arc to the next point about the centre after c; other vN are vias at no path point)
+5V_PCB: XP1.1 XP1.6 XP3.25 XS2.14 XS5.12 XS6.2 | length 300.8
  Mid-Layer 1 w0.5: v1(3.225,94.95) 3.25,94.925 v1(3.25,53.1) 3.25,30.2 v1(3.246,30.196) 3.25,30.192 3.25,8.275 9.35,2.175 71.675,2.175 76.35,6.85 XP3.25 77.675,10.055 77.675,47.675 v1(77.625,47.725) ; v1@97.195,47.725 XS2.14
  Mid-Layer 2 w0.5: v1(3.225,94.95) 18.265,94.95 XP1.1 21.715,98.4 24.255,98.4 XP1.6 ; v1(3.246,30.196) 3.26,30.21 XS6.2 ; v1(3.25,53.1) 3.26,53.09 XS5.12 ; v1(77.625,47.725) v1(97.125,47.725)
-5V_PCB: XP1.2 XP1.5 XP3.26 XS2.16 XS6.5 | length 292.1
  Mid-Layer 1 w0.5: v1(4.45,32.525) 4.45,85.984 4.423,86.011 4.423,86.152 v1(4.385,86.19) 4.423,86.229 4.423,86.37 4.45,86.397 v1(4.45,96.075) ; XS6.5 13.66,34.075 11.55,34.075 v1(10,32.525) 10,28.6 15.775,22.825 15.775,6.85 19.75,2.875 71.385,2.875 75.1,6.59 75.1,10.02 XP3.26 ; XP1.2 21.825,98.4 24.365,98.4 XP1.5 ; XS2.16 95.975,82.17 v1(95.975,86.125)
  Mid-Layer 2 w0.5: v1(4.385,86.19) 4.4,86.175 95.871,86.175 95.921,86.125 v1(95.975,86.125) ; v1(4.45,32.525) v1(10,32.525) ; v1(4.45,96.075) 16.85,96.075 XP1.2
ADDR1_PCB: XP2.29 XS2.50 XS4.9 | length 134.7
  Mid-Layer 1 w0.5: v1(51.425,73.106) 51.425,73.16 51.475,73.21 XS2.50 ; XP2.29 107.575,97.13 107.575,93.4 114.744,86.231 114.744,47.744 v1(114.725,47.725)
  Mid-Layer 2 w0.5: v1(51.425,73.106) 114.596,73.106 114.69,73.2 v1(114.744,73.2) ; v1(114.725,47.725) 125.84,47.725 XS4.9
ADDR2_PCB: XP2.30 XS2.52 XS4.12 | length 148.4
  Mid-Layer 1 w0.5: v1(48.725,72) 48.935,72.21 XS2.52 ; XP2.30 108.825,98.42 108.825,93.75 115.823,86.752 v1(115.823,43.963)
  Mid-Layer 2 w0.5: v1(48.725,72) 115.825,72 v1(115.85,71.975) ; v1(115.823,43.963) 115.861,43.924 116.002,43.924 116.027,43.9 127.135,43.9 XS4.12
ADDR3_PCB: XP2.27 XS4.11 | length 71
  Mid-Layer 1 w0.5: XP2.27 104.98,93.22 108.6,89.6 108.6,45.025 v1(108.625,45)
  Mid-Layer 2 w0.5: v1(108.625,45) 125.695,45 XS4.11
ADDR4_PCB: XP2.28 XS4.14 | length 78.3
  Mid-Layer 1 w0.5: XP2.28 106.3,98.405 106.3,93.325 111.125,88.5 111.125,42.8 v1(111.15,42.775)
  Mid-Layer 2 w0.5: v1(111.15,42.775) 122.9,42.775 124.825,40.85 126.625,40.85 XS4.14
ADDR5_PCB: XP2.25 XS4.10 | length 74.9
  Mid-Layer 1 w0.5: XP2.25 102.44,93.985 106.075,90.35 106.075,46.629 v1(106.089,46.615)
  Mid-Layer 2 w0.5: v1(106.089,46.615) 106.143,46.615 106.253,46.505 127.2,46.505 XS4.10
ADDR6_PCB: XP2.26
GND_PCB: XP1.3 XP1.4 XP3.22 XP3.23 XP3.24 XS2.1 XS2.3 XS2.5 XS2.7 XS2.9 XS2.11 XS2.13 XS2.15 XS2.17 XS2.19 XS2.25 XS2.27 XS2.29 XS2.35 XS2.41 XS2.45 XS2.47 XS2.49 XS2.51 XS2.59 XS3.4 XS4.3 XS4.7 XS4.13 XS5.11 XS5.13 XS5.15 XS5.19 XS6.1
  other v2: 13.575,5.375 39.275,7.5 108.65,16.925 5.975,25.775 130.35,25.925 45.425,27.275 96.2,27.65 47.35,29.25 75.3,32.425 36.925,37.7 111.9,39.825 52.325,53.825 52.525,68.2 86.85,69.125 17.475,71.05 129.775,71.15 103.225,89.825 67.85,90.175 5.625,91.8 135.5,94.8
INT1_PCB: XP2.16 XP3.14 XS2.10 XS5.8 | length 184.9
  Top Layer w0.5: XP2.16 90.975,98.49 90.975,95.3 101.025,85.25 101.025,82.1 XS2.10
  Mid-Layer 1 w0.5: v1(61.075,51) 61.075,44.375 61.11,44.34 XP3.14 ; XS2.10 102.275,51.079 102.325,51.029 v1(102.325,50.975)
  Mid-Layer 2 w0.5: XS5.8 13.6,49.275 17.3,49.275 19,50.975 61.05,50.975 v1(61.075,51) 61.1,50.975 v1(102.325,50.975)
INT2_PCB: XP2.13 XP3.15 XS2.30 XS5.7 | length 161.4
  Mid-Layer 1 w0.5: v1(62.825,49.99) 62.787,49.951 62.787,49.81 62.775,49.798 62.775,39.025 62.35,38.6 62.35,10.6 63.459,9.491 63.459,8.921 XP3.15 ; v1(76.846,49.925) 76.875,49.954 XS2.30 78.215,82.19 80.14,82.19 80.675,82.725 80.675,95.55 v1(80.693,95.568) ; v1(87.1,95.525) 87.1,95.579 87.2,95.679 XP2.13
  Mid-Layer 2 w0.5: XS5.7 19.21,48.01 21.25,50.05 62.623,50.05 62.645,50.028 62.787,50.028 v1(62.825,49.99) 76.727,49.99 76.792,49.925 v1(76.846,49.925) ; v1(80.693,95.568) 80.747,95.568 80.791,95.525 v1(87.1,95.525)
INT3_PCB: XP2.14 XP3.16 XS2.36 XS5.6 | length 165.3
  Mid-Layer 1 w0.5: XP3.16 63.688,11.308 v1(63.688,47.558) ; v1(69.15,47.55) 69.15,80.745 70.525,82.12 70.525,94.6 v1(70.5,94.625) ; XP2.14 87.2,99.6 88.475,98.325 88.475,94.76 88.369,94.654 v1(88.369,94.6)
  Mid-Layer 2 w0.5: XS5.6 13.615,46.75 19.925,46.75 20.775,47.6 63.504,47.6 63.508,47.597 63.649,47.597 63.696,47.55 v1(69.15,47.55) ; v1(70.5,94.625) 70.525,94.6 84.344,94.6 v1(88.369,94.6)
INT4_PCB: XP2.11 XP3.30 XS2.42 XS5.5 | length 177.1
  Mid-Layer 1 w0.5: v1(61.529,93.821) 61.55,93.8 61.55,86 60.4,84.85 60.4,82.085 XS2.42 61.826,80.659 61.826,80.156 61.925,80.057 61.925,45.129 61.875,45.079 v1(61.875,45.025) ; XP3.30 81.45,11.29 v1(81.45,45.1) ; XP2.11 84.66,93.815 v1(84.675,93.8)
  Mid-Layer 2 w0.5: XS5.5 20.055,45.47 20.55,44.975 61.684,44.975 61.695,44.987 61.837,44.987 v1(61.875,45.025) 81.321,45.025 81.396,45.1 v1(81.45,45.1) ; v1(61.529,93.821) 61.55,93.8 v1(84.675,93.8)
INT5_PCB: XP2.12 XP3.31 XS2.48 XS5.4 | length 200.1
  Mid-Layer 1 w0.5: v1(52.829,93.025) 52.815,93.011 52.815,82.05 54.15,80.715 v1(54.15,42.5) ; XP3.31 83.97,8.877 85.17,10.077 85.17,41.25 85.295,41.375 v1(85.295,42.6) ; XP2.12 85.925,98.46 85.925,93.05 v1(85.916,93.041)
  Mid-Layer 2 w0.5: XS5.4 13.605,44.2 18.7,44.2 20.375,42.525 54.125,42.525 v1(54.15,42.5) 83.945,42.5 84.045,42.6 v1(85.295,42.6) ; v1(52.829,93.025) 53.954,93.025 54.054,93.125 54.179,93 85.734,93 85.736,93.003 85.878,93.003 v1(85.916,93.041)
INT6_PCB: XP2.9 XP3.32 XS2.24 XS5.3 | length 158.7
  Mid-Layer 1 w0.5: XP2.9 82.12,94.43 85.825,90.725 85.825,82.18 XS2.24 84.304,80.659 84.304,80.186 84.175,80.057 84.175,12.063 84.161,12.049 84.161,11.461 XP3.32
  Mid-Layer 2 w0.5: XS5.3 17.495,42.93 20.525,39.9 v1(84.15,39.9)
INT7_PCB: XP2.10 XS5.2 | length 134
  Mid-Layer 1 w0.5: v1(8.4,40.425) v1(8.4,92.9) ; v1(68.95,94.625) 70.25,95.925 70.25,97.611 71.163,98.525 80.92,98.525 XP2.10
  Mid-Layer 2 w0.5: v1(8.4,40.425) 12.3,40.425 XS5.2 ; v1(8.4,92.9) 19.275,92.9 21,94.625 v1(68.95,94.625)
INT8_PCB: XP2.7 XS5.1 | length 140.5
  Mid-Layer 1 w0.5: v1(6.75,94.025) 6.75,93.971 6.833,93.888 v1(6.833,38.025) ; XP2.7 79.58,95.67 v1(79.6,95.65)
  Mid-Layer 2 w0.5: v1(6.75,94.025) 6.788,93.987 6.93,93.987 6.941,93.975 18.975,93.975 20.65,95.65 v1(79.6,95.65) ; v1(6.833,38.025) 6.887,38.025 6.987,38.125 13.225,38.125 14.402,39.302 14.402,39.917 XS5.1
LED1_PCB: XP2.23 XS3.1 | length 78.8
  Mid-Layer 1 w0.5: XP2.23 99.9,85.95 101.05,84.8 101.05,36.579 100.925,36.454 v1(100.925,36.4)
  Mid-Layer 2 w0.5: v1(100.925,36.4) 118.335,36.4 XS3.1
LED2_PCB: XP2.24 XS3.2 | length 82.2
  Mid-Layer 1 w0.5: XP2.24 101.175,98.45 101.175,86.75 103.55,84.375 103.55,33.95 v1(103.525,33.925)
  Mid-Layer 2 w0.5: v1(103.525,33.925) 118.27,33.925 XS3.2
LED3_PCB: XP2.21 XS3.3 | length 86.9
  Mid-Layer 1 w0.5: XP2.21 97.36,85.99 98.475,84.875 98.475,30.925 v1(98.425,30.875)
  Mid-Layer 2 w0.5: v1(98.425,30.875) 117.699,30.875 118.104,31.28 XS3.3
LED4_PCB: XP2.22
LED5_PCB: XP2.19
LED6_PCB: XP2.20
NetXS2_54: XS2.54 XS2.55 | length 3.6
  Mid-Layer 2 w0.5: XS2.55 XS2.54
RS485_A_PCB: XP1.19 XS2.53 XS2.58 XS4.4 | length 130.6
  Mid-Layer 1 w0.5: XS2.58 42.535,82.07 45.075,82.07 ; XP1.19 43.36,90.265 46.395,87.23 XS2.53 45.075,82.07 ; v1(45.075,56.5) 45.075,82.07
  Mid-Layer 2 w0.5: v1(45.075,56.5) 45.129,56.5 45.179,56.55 127.175,56.55 XS4.4
RS485_B_PCB: XP1.20 XS2.56 XS2.57 XS4.1 | length 125.8
  Mid-Layer 1 w0.5: XS2.57 41.315,92.365 42.1,93.15 42.1,97.85 43.169,98.919 43.169,99.534 XP1.20 ; v1(43.809,57.92) 43.809,57.974 43.855,58.02 XS2.56
  Mid-Layer 2 w0.5: XS2.57 XS2.56 ; v1(43.809,57.92) 43.863,57.92 43.918,57.865 XS4.1
SPI_CLK_PCB+: XP1.35 XP3.5 | length 140
  Mid-Layer 1 w0.5: v1(30.225,19.325) v1(30.225,91.475) ; v1(49.725,19.325) 49.7,19.3 49.7,9.98 XP3.5
  Mid-Layer 2 w0.5: v1(30.225,19.325) v1(49.725,19.325)
  Bottom Layer w0.5: v1(30.225,91.475) 30.263,91.513 30.405,91.513 30.416,91.525 60.365,91.525 63.68,94.84 XP1.35
SPI_CLK_PCB-: XP1.36 XP3.6 | length 141.4
  Mid-Layer 1 w0.5: v1(29.425,18.55) v1(29.425,92.25) ; XP3.6 v1(50.95,18.525)
  Mid-Layer 2 w0.5: v1(29.425,18.55) 29.45,18.525 v1(50.95,18.525)
  Bottom Layer w0.5: v1(29.425,92.25) 29.45,92.275 52.447,92.275 52.497,92.225 58.725,92.225 62.45,95.95 62.45,98.495 XP1.36
SPI_MISO_PCB+: XP1.37 XP3.3 | length 135.3
  Mid-Layer 1 w0.5: v1(31.875,20.925) 31.888,20.938 31.888,89.738 v1(31.9,89.75) ; v1(47.2,20.925) 47.21,20.915 47.21,9.93 XP3.3
  Mid-Layer 2 w0.5: v1(31.875,20.925) v1(47.2,20.925)
  Bottom Layer w0.5: v1(31.9,89.75) 60.57,89.75 66.22,95.4 XP1.37
SPI_MISO_PCB-: XP1.38 XP3.4 | length 137.6
  Mid-Layer 1 w0.5: v1(31.025,20.175) v1(31.025,90.575) ; XP3.4 48.41,20.11 v1(48.425,20.125)
  Mid-Layer 2 w0.5: v1(31.025,20.175) 31.079,20.175 31.129,20.125 v1(48.425,20.125)
  Bottom Layer w0.5: v1(31.025,90.575) 31.063,90.613 31.205,90.613 31.216,90.625 60.455,90.625 64.975,95.145 64.975,98.48 XP1.38
SPI_MOSI_PCB+: XP1.39 XP3.1 | length 130.2
  Mid-Layer 1 w0.5: v1(33.65,22.488) v1(33.65,87.85) ; v1(44.425,22.488) 44.425,10.175 XP3.1
  Mid-Layer 2 w0.5: v1(33.65,22.488) v1(44.425,22.488)
  Bottom Layer w0.5: v1(33.65,87.85) 60.65,87.85 68.76,95.96 XP1.39
SPI_MOSI_PCB-: XP1.40 XP3.2 | length 132.7
  Mid-Layer 1 w0.5: v1(32.85,21.725) 32.85,88.552 32.893,88.595 32.893,88.737 v1(32.931,88.775) ; XP3.2 45.87,21.616 45.95,21.696 v1(45.95,21.75)
  Mid-Layer 2 w0.5: v1(32.85,21.725) 32.888,21.688 45.833,21.688 45.896,21.75 v1(45.95,21.75)
  Bottom Layer w0.5: v1(32.931,88.775) 32.969,88.813 33.111,88.813 33.148,88.85 60.66,88.85 67.575,95.765 67.575,96.673 67.56,96.688 67.56,98.525 XP1.40
SPI_SS_PCB+: XP1.33 XP3.7 | length 143.4
  Mid-Layer 1 w0.5: v1(28.625,17.725) v1(28.625,93.025) ; v1(52.175,17.725) 52.175,10.045 XP3.7
  Mid-Layer 2 w0.5: v1(28.625,17.725) v1(52.175,17.725)
  Bottom Layer w0.5: v1(28.625,93.025) 28.65,93.05 51.425,93.05 52.3,93.925 59.25,93.925 61.14,95.815 XP1.33
SPI_SS_PCB-: XP1.34 XP3.8 | length 145.6
  Mid-Layer 1 w0.5: v1(27.775,93.675) 27.8,93.65 v1(27.8,16.925) ; XP3.8 53.49,16.915 v1(53.5,16.925)
  Mid-Layer 2 w0.5: v1(27.8,16.925) v1(53.5,16.925)
  Bottom Layer w0.5: v1(27.775,93.675) 27.829,93.675 27.979,93.825 51.05,93.825 51.85,94.625 58.8,94.625 59.875,95.7 59.875,98.46 XP1.34
SR_DS_PCB: XP2.17 XP3.29 XS2.4 | length 128.9
  Mid-Layer 1 w0.5: XP3.29 82.725,10.025 v1(82.725,19.575) ; XP2.17 92.28,95.695 93.45,94.525 v1(93.45,68.675) 93.45,19.6 v1(93.425,19.575) ; XS2.4 109.895,68.834 109.95,68.779 v1(109.95,68.725)
  Mid-Layer 2 w0.5: v1(82.725,19.575) v1(93.425,19.575) ; v1(93.45,68.675) 93.488,68.713 93.63,68.713 93.641,68.725 v1(109.95,68.725)
SR_SHCP_PCB: XP2.15 XP3.27 XS2.6 | length 129.8
  Mid-Layer 1 w0.5: XP3.27 80.2,10.04 v1(80.2,18.5) ; XP2.15 89.74,93.885 90.85,92.775 v1(90.85,67.6) v1(90.85,18.55) ; XS2.6 107.4,80.805 v1(107.4,67.7)
  Mid-Layer 2 w0.5: v1(80.2,18.5) 90.746,18.5 90.796,18.55 v1(90.85,18.55) ; v1(90.85,67.6) 107.3,67.6 v1(107.4,67.7)
SR_STCP_PCB: XP2.18 XP3.28 XS2.8 | length 119.7
  Top Layer w0.5: XP2.18 93.475,98.53 93.475,97.687 93.48,97.682 93.48,94.445 103.575,84.35 103.575,82.09 XS2.8
  Mid-Layer 1 w0.5: v1(78.875,49.875) 78.89,49.86 XP3.28 ; XS2.8 104.815,49.831 v1(104.821,49.825)
  Mid-Layer 2 w0.5: v1(78.875,49.875) 104.717,49.875 104.767,49.825 v1(104.821,49.825)
SVBP1_PCB: XP1.17 XS2.26 XS6.6 | length 151.6
  Mid-Layer 1 w0.5: v1(5.525,85.2) 5.525,35.504 5.65,35.379 v1(5.65,35.325) ; v1(40.275,85.225) 40.275,92.8 40.82,93.345 XP1.17 ; XS2.26 83.25,82.145 83.25,85.167 83.3,85.217 v1(83.3,85.271)
  Mid-Layer 2 w0.5: v1(5.525,85.2) 5.55,85.225 40.329,85.225 40.367,85.263 40.455,85.263 40.462,85.271 v1(83.3,85.271) ; v1(5.65,35.325) 5.704,35.325 5.804,35.225 12.27,35.225 XS6.6
SVBP2_PCB: XP1.18
TRM_SCL_PCB: XP2.32 XS2.39 | length 117.1
  Mid-Layer 1 w0.5: v1(62.85,63.35) 62.85,82.065 XS2.39 ; XP2.32 111.325,98.46 111.325,94.425 119.075,86.675 119.075,63.3 v1(119.1,63.275)
  Mid-Layer 2 w0.5: v1(62.85,63.35) 64.125,63.35 64.2,63.275 v1(119.1,63.275)
TRM_SDA_PCB: XP2.31 XS2.40 | length 126
  Mid-Layer 1 w0.5: v1(64,54.125) 64,80.675 XS2.40 ; XP2.31 110.06,94.165 117.2,87.025 v1(117.2,54.175)
  Mid-Layer 2 w0.5: v1(64,54.125) 64.038,54.163 64.18,54.163 64.191,54.175 v1(117.2,54.175)
UART6_RX: XP1.32 XP3.12 | length 89.5
  Top Layer w0.5: XP3.12 58.57,11.393 57.9,12.063 57.9,80.348 57.895,80.353 57.895,84.455 57.375,84.975 57.375,98.5 XP1.32
UART6_TX: XP1.31 XP3.11 | length 90.7
  Top Layer w0.5: XP3.11 59.825,9.985 59.825,11.975 58.8,13 58.8,58.65 60.295,60.145 60.295,85.055 58.6,86.75 XP1.31
UIM_IN1_PCB: XP1.21 XP3.13 XS2.2 XS5.9 | length 217.2
  Top Layer w0.5: XP1.21 45.9,88.925 47.7,87.125 47.7,57.05 48.612,56.138 v1(48.612,52.013)
  Mid-Layer 1 w0.5: v1(59.85,51.985) 59.85,9.99 XP3.13 ; v1(112.475,51.985) XS2.2@112.475,80.81
  Mid-Layer 2 w0.5: XS5.9 14.935,50.61 16.375,50.61 17.815,52.05 48.612,52.05 58.5,52.05 58.565,51.985 v1(59.85,51.985) ; v1@59.85,52.025 59.89,51.985 v1(112.475,51.985)
UIM_IN2_PCB: XP1.22 XS1.1 XS5.10 | length 131.3
  Mid-Layer 1 w0.5: v1(26.215,8.21) 26.225,8.22 26.225,53.229 v1(26.233,53.238) ; XP1.22 44.7,98.525 44.7,90.1 47.735,87.065 47.735,80.353 47.75,80.338 v1(47.75,53.225)
  Mid-Layer 2 w0.5: XS5.10 13.675,51.89 16.465,51.89 17.825,53.25 26.221,53.25 26.246,53.225 v1(47.75,53.225) ; XS1.1 v1(26.215,8.21)
UIM_OUT1_PCB: XP1.25
UIM_OUT1_PCB+: XP1.27
UIM_OUT1_PCB-: XP1.28
UIM_OUT2_PCB: XP1.24 XS1.24 | length 94.6
  Mid-Layer 1 w0.5: XP1.24 47.2,98.485 47.2,88.6 50.275,85.525 50.275,80.353 50.325,80.303 v1(50.325,35.975)
  Mid-Layer 2 w0.5: XS1.24 22.41,35.975 23.253,35.975 24.278,34.95 25.272,34.95 26.297,35.975 v1(50.325,35.975)
UIM_OUT2_PCB+: XP1.26 XP3.9 XS4.8 | length 167.3
  Mid-Layer 1 w0.5: XP1.26 52.25,98.455 52.25,96.075 53.9,94.425 53.9,88.35 55.25,87 55.25,49.133 55.238,49.121 55.238,48.98 v1(55.2,48.942) 55.2,12.95 54.725,12.475 54.725,10.035 XP3.9
  Mid-Layer 2 w0.5: v1(55.2,48.942) 127.097,48.942 XS4.8
UIM_OUT2_PCB-: XP1.23 XP3.10 XS4.5 | length 169.8
  Mid-Layer 1 w0.5: XP1.23 49.725,98.47 49.725,100.725 50.475,101.475 53.7,101.475 54.75,100.425 54.75,89.025 57.775,86 57.775,53.55 v1@57.175,52.95 ; XP3.10 57.175,12.415 57.175,32.618 57.1,32.693 v1(57.1,52.95)
  Mid-Layer 2 w0.5: v1(57.1,52.95) 58.285,52.95 58.45,52.785 XS4.5
VOLT1_PCB: XP2.39 XP3.17 XS2.18 XS6.3 | length 248.9
  Mid-Layer 1 w0.5: XS6.3 16.3,32.75 17.2,31.85 17.2,7.405 20.33,4.275 64.085,4.275 66.19,6.38 XP3.17 64.99,9.93 64.99,11.767 65,11.777 v1(65,65.5) ; v1(92.104,65.5) 92.115,65.511 XS2.18 ; XP2.39 126.4,91.005 v1(126.4,65.525)
  Mid-Layer 2 w0.5: v1(65,65.5) 126.375,65.5 v1(126.4,65.525)
VOLT2_PCB: XP2.40 XP3.18 XS2.20 XS6.4 | length 254.6
  Mid-Layer 1 w0.5: XS6.4 13.585,31.5 15.9,31.5 16.5,30.9 16.5,7.115 20.04,3.575 64.375,3.575 67.5,6.7 67.5,9.96 XP3.18 66.19,66.565 v1(66.2,66.575) ; XS2.20 89.575,66.625 v1(89.6,66.6) ; XP2.40 120.375,99.725 127.375,92.725 v1(127.375,66.525)
  Mid-Layer 2 w0.5: v1(66.2,66.575) 66.225,66.6 127.246,66.6 127.321,66.525 v1(127.375,66.525)
VOLT3_PCB: XP2.37 XP3.19 XS2.12 XS5.20 | length 225.1
  Mid-Layer 1 w0.5: XP3.19 70.485,6.975 71.775,6.975 72.55,7.75 v1(72.55,64.525) ; v1(99.696,64.6) 99.734,64.638 v1@99.734,64.78 ; v1@99.735,64.781 XS2.12 ; XP2.37 117.68,95.67 123.8,89.55 v1(123.8,64.625)
  Mid-Layer 2 w0.5: XS5.20 13.61,64.525 v1(72.55,64.525) 72.575,64.5 99.542,64.5 99.642,64.6 123.775,64.6 v1(123.8,64.625)
VOLT4_PCB: XP2.38 XP3.20 XS2.60 XS5.16 | length 226.9
  Mid-Layer 1 w0.5: XS2.60 38.775,59.529 38.825,59.479 v1(38.825,59.425) ; v1(68.291,59.388) 68.291,11.98 68.73,11.541 XP3.20 ; XP2.38 119,98.405 119,96.2 125.425,89.775 v1(125.425,59.45)
  Mid-Layer 2 w0.5: XS5.16 13.565,59.4 38.8,59.4 v1@38.85,59.45 ; v1(38.825,59.425) 38.85,59.4 68.279,59.4 v1(68.291,59.388) 125.363,59.388 v1(125.425,59.45)
VOLT5_PCB: XP2.35 XP3.21 XS2.28 XS5.14 | length 227.5
  Mid-Layer 1 w0.5: v1(70.125,55.6) 70.087,55.562 70.087,55.42 70.07,55.404 70.07,9.93 XP3.21 ; XS2.28 79.415,55.61 v1(79.425,55.6) ; XP2.35 115.14,95.11 121.825,88.425 v1(121.825,55.65)
  Mid-Layer 2 w0.5: XS5.14 13.63,56.925 17.05,56.925 18.375,55.6 v1(70.125,55.6) v1(79.425,55.6) 121.775,55.6 v1(121.825,55.65)
VOLT6_PCB: XP2.36 XP3.33 XS5.17 | length 202.4
  Mid-Layer 1 w0.5: XP3.33 87.8,10.02 87.8,60.594 87.7,60.694 v1(87.7,60.748) ; XP2.36 116.4,98.465 116.4,95.525 122.625,89.3 v1(122.625,60.75)
  Mid-Layer 2 w0.5: XS5.17 87.662,60.71 v1(87.7,60.748) 122.623,60.748 v1(122.625,60.75)
VOLT7_PCB: XP2.33 XP3.34 XS5.18 | length 197.4
  Mid-Layer 1 w0.5: v1(86.525,62.025) 86.525,11.285 XP3.34 XP3.34@86.701,11.079 ; XP2.33 112.6,94.575 119.925,87.25 v1(119.925,62)
  Mid-Layer 2 w0.5: XS5.18 13.625,62 86.5,62 v1(86.525,62.025) 86.55,62 v1(119.925,62)
VOLT8_PCB: XP2.34 XP3.35 XP3.36 | length 126.7
  Mid-Layer 1 w0.5: XP3.35@88.859,8.921 XP3.35 ; XP3.36 v1(89.05,22.7) ; XP2.34 113.9,98.425 113.9,94.75 120.925,87.725 120.925,22.7 v1(120.85,22.625)
  Mid-Layer 2 w0.5: v1(89.05,22.7) 89.088,22.662 89.23,22.662 89.266,22.625 v1(120.85,22.625)
  Bottom Layer w0.5: XP3.35 XP3.36
pads on no net: REPER1.REP REPER2.REP REPER3.REP REPER4.REP REPER5.REP REPER6.REP XP1.7 XP1.8 XP1.9 XP1.10 XP1.11 XP1.12 XP1.13 XP1.14 XP1.15 XP1.16 XP1.29 XP1.30 XP2.1 XP2.2 XP2.3 XP2.4 XP2.5 XP2.6 XP2.8 XP3.37 XP3.38 XP3.39 XP3.40 XS1.2 XS1.3 XS1.4 XS1.5 XS1.6 XS1.7 XS1.8 XS1.9 XS1.10 XS1.11 XS1.12 XS1.13 XS1.14 XS1.15 XS1.16 XS1.17 XS1.18 XS1.19 XS1.20 XS1.21 XS1.22 XS1.23 XS1.25 XS1.26 XS1.27 XS1.28 XS1.29 XS1.30 XS1.31 XS1.32 XS1.33 XS1.34 XS2.21 XS2.22 XS2.23 XS2.31 XS2.32 XS2.33 XS2.34 XS2.37 XS2.38 XS2.43 XS2.44 XS2.46 XS4.2 XS4.6

## Polygon pours and split planes (outlines as drawn)
no net on Top Overlay "NONET_L-01_P-001" (solid): 107.15,2.6 107.15,5.6 114.15,5.6 114.15,2.6
GND_PCB on Top Layer "NONET_L-01_P-001" (solid, pour order 3): 0.25,109.75 0.25,0.25 139.75,0.25 139.75,109.75
GND_PCB on Bottom Layer "NONET_L-01_P-001" (solid, pour order 2): 0.245,109.75 0.245,0.245 139.75,0.245 139.75,109.75

## Keep-outs
Keep-Out Layer:
  the board outline again, w0.1

## Silkscreen, mask and mechanical layers (free items; w line width, h text height)
Top Overlay:
  lines w0.2: 3.975,100 cw(c9.975,100) 9.975,106 ; 4.075,9.9 ccw(c10.075,9.9) 10.075,3.9 ; 4.675,37.825 8.625,37.825 ; 4.975,100 cw(c9.975,100) 9.975,105 ; 5.075,9.9 ccw(c10.075,9.9) 10.075,4.9 ; 5.975,100 cw(c9.975,100) 9.975,104 ; 6.075,9.9 ccw(c10.075,9.9) 10.075,5.9 ; 11.065,36.625 9.875,36.625 8.65,37.85 9.855,39.055 11.065,39.055 ; 18.975,37.775 19.825,37.775 19.825,36.175 20.8,36.175 ; 129.925,104 cw(c129.925,100) 133.925,100 ; 129.925,105 cw(c129.925,100) 134.925,100 ; 129.925,106 cw(c129.925,100) 135.925,100 ; 130.025,4.125 ccw(c130.025,10.125) 136.025,10.125 ; 130.025,5.125 ccw(c130.025,10.125) 135.025,10.125 ; 130.025,6.125 ccw(c130.025,10.125) 134.025,10.125
  lines w0.25: 42.4,28.475 46.125,28.475 ; 42.4,30.2 40.675,30.2 44.775,26.1 52.6,26.1 50.238,28.462 ; 43.975,32.35 43.975,34.675 48.525,30.125 48.525,22.35 46.125,24.75 ; 46.1,28.5 48.513,26.087 ; 46.125,26.1 46.125,24.75 ; 46.125,28.5 46.125,32.381 ; 48.563,28.462 50.225,28.462 50.225,32.35 42.4,32.35 42.4,24.75 46.125,24.75 ; 48.575,24.4 50.275,24.4 50.275,26.075
  text "+5V" at 21.075,93.175 h1 r90
  text "GND" at 23.6,93.175 h1 r90
  text "-5V" at 26.175,93.125 h1 r90
  text "SS+" at 61.6,93.05 h1 r90
  text "LED1" at 100.325,92.55 h1 r90
  text "INT8" at 80.025,92.45 h1 r90
  text "INT6" at 82.6,92.425 h1 r90
  text "INT4" at 85.15,92.425 h1 r90
  text "INT2" at 87.7,92.35 h1 r90
  text "LED3" at 97.875,92.2 h1 r90
  text "LED5" at 95.35,92.15 h1 r90
  text "CLK+" at 64.15,92 h1 r90
  text "VOLT1" at 120.7,91.7 h1 r90
  text "ADDR1" at 108.05,91.55 h1 r90
  text "SR_DS" at 92.733,91.3 h1 r90
  text "VOLT3" at 118.1,91.3 h1 r90
  text "VOLT7" at 113.15,91.25 h1 r90
  text "VOLT5" at 115.55,91.25 h1 r90
  text "MISO+" at 66.7,91.2 h1 r90
  text "MOSI+" at 69.35,91.225 h1 r90
  text "ADDR5" at 102.9,91.175 h1 r90
  text "ADDR3" at 105.5,91.175 h1 r90
  text "U6_TX" at 59.058,90.75 h1 r90
  text "RS485_A" at 43.808,89.375 h1 r90
  text "TRM_SDA" at 110.433,89.3 h1 r90
  text "SR_SHCP" at 90.258,89.25 h1 r90
  text "UIM_OUT1" at 51.283,88.775 h1 r90
  text "UIM_OUT1+" at 53.158,88 h1 r90
  text "RS485_A" at 46.858,85.475 h1 r90
  text "GND" at 51.925,85.475 h1 r90
  text "GND" at 62,85.45 h1 r90
  text "TRM_SCL" at 64.708,85.45 h1 r90
  text "GND" at 69.675,85.45 h1 r90
  text "GND" at 82.3,85.45 h1 r90
  text "GND" at 90,85.45 h1 r90
  text "RS485_B" at 41.783,85.425 h1 r90
  text "GND" at 54.45,85.425 h1 r90
  text "GND" at 56.95,85.425 h1 r90
  text "GND" at 77.225,85.425 h1 r90
  text "GND" at 79.8,85.425 h1 r90
  text "GND" at 92.55,85.425 h1 r90
  text "GND" at 95.225,85.425 h1 r90
  text "GND" at 39.25,85.4 h1 r90
  text "GND" at 49.475,85.4 h1 r90
  text "GND" at 97.7,85.4 h1 r90
  text "GND" at 100.175,85.375 h1 r90
  text "GND" at 102.725,85.35 h1 r90
  text "GND" at 107.825,85.35 h1 r90
  text "GND" at 110.375,85.325 h1 r90
  text "GND" at 112.95,85.325 h1 r90
  text "GND" at 105.25,85.3 h1 r90
  text "7KWT" at 115.075,81.3 h3
  text "-5V" at 95.25,76.125 h1 r90
  text "+5V" at 97.725,76.1 h1 r90
  text "INT1" at 102.75,75.55 h1 r90
  text "INT4" at 61.975,75.35 h1 r90
  text "INT6" at 84.825,75.25 h1 r90
  text "INT5" at 54.5,75.225 h1 r90
  text "INT2" at 77.35,75.175 h1 r90
  text "INT3" at 69.675,75.15 h1 r90
  text "VOLT1" at 92.575,74.525 h1 r90
  text "SVBP1" at 82.45,74.5 h1 r90
  text "ADDR1" at 51.95,74.375 h1 r90
  text "VOLT4" at 39.25,74.2 h1 r90
  text "VOLT5" at 79.975,74.05 h1 r90
  text "VOLT2" at 90.05,74.05 h1 r90
  text "VOLT3" at 100.225,74.05 h1 r90
  text "ADDR2" at 49.45,74 h1 r90
  text "SR_DS" at 110.433,73.95 h1 r90
  text "UIM_IN1" at 112.908,72.8 h1 r90
  text "RS485_B" at 44.308,72.25 h1 r90
  text "RS485_A" at 41.708,72.175 h1 r90
  text "TRM_SDA" at 64.708,72.175 h1 r90
  text "SR_STCP" at 105.308,72.025 h1 r90
  text "SR_SHCP" at 107.833,71.975 h1 r90
  text "VOLT3" at 5.875,62.775 h1
  text "GND" at 16.825,62.75 h1
  text "VOLT7" at 5.828,60.253 h1
  text "VOLT6" at 16.9,60.2 h1
  text "VOLT4" at 5.775,57.7 h1
  text "GND" at 16.85,57.65 h1
  text "RS485_B" at 117.1,57.392 h1
  text "NPC RADAR SERVICE" at 60.725,56.46 h3
  text "VOLT5" at 5.75,55.15 h1
  text "GND" at 16.825,55.125 h1
  text "GND" at 121.075,54.875 h1
  text "RS485_A" at 130.5,54.817 h1
  text "SYS UPR TEST UU" at 62.775,53.658 h3
  text "+5V" at 7.7,52.6 h1
  text "GND" at 16.85,52.55 h1
  text "UIM_OUT2-" at 115.2,52.392 h1
  text "7KWT" at 26.5,51.075 h3 r90
  text "INTERFACE BOARD" at 62.2,50.883 h3
  text "UIM_IN1" at 16.475,50.617 h1
  text "UIM_IN2" at 4.05,50.092 h1
  text "GND" at 121,49.85 h1
  text "UIM_OUT2+" at 130.475,49.692 h1
  text "INT1" at 7.25,47.575 h1
  text "v.2023.03.06" at 66.25,47.558 h3
  text "INT2" at 16.6,47.425 h1
  text "ADDR5" at 130.5,47.25 h1
  text "ADDR1" at 119.375,47.2 h1
  text "INT3" at 6.9,44.975 h1
  text "INT4" at 16.525,44.925 h1
  text "ADDR2" at 130.525,44.75 h1
  text "ADDR3" at 118.95,44.65 h1
  text "INT5" at 6.85,42.35 h1
  text "ADDR4" at 130.525,42.225 h1
  text "INT6" at 16.575,42.2 h1
  text "GND" at 120.9,42 h1
  text "INT7" at 6.75,39.85 h1
  text "INT8" at 16.575,39.725 h1
  text "UIM_OUT2" at 11,37.367 h1
  text "400" at 128.081,36.207 h3 r90
  text "LED1" at 120.725,35.85 h1
  text "400" at 3.792,35.5 h3 r90
  text "SVBP1" at 5.975,34.925 h1
  text "-5V" at 16.9,34.725 h1
  text "LED2" at 120.75,33.275 h1
  text "VOLT2" at 5.525,32.275 h1
  text "VOLT1" at 16.45,32.1 h1
  text "RZ" at 38.878,31.347 h4 r45
  text "LED3" at 120.719,30.832 h1
  text "GND" at 17.025,29.65 h1
  text "+5V" at 7.5,29.625 h1
  text "GND" at 120.725,28.275 h1
  text "400" at 119.267,22.025 h3 r90
  text "BP" at 2.15,19.55 h1 r90
  text "VOLT7" at 87.05,13.325 h1 r90
  text "VOLT4" at 69.25,13.3 h1 r90
  text "GND" at 71.775,13.3 h1 r90
  text "GND" at 74.325,13.3 h1 r90
  text "-5V" at 76.825,13.3 h1 r90
  text "VOLT2" at 66.825,13.275 h1 r90
  text "U6_RX" at 59.058,13.225 h1 r90
  text "INT1" at 61.625,13.225 h1 r90
  text "MOSI-" at 46.425,13.2 h1 r90
  text "MISO-" at 48.9,13.2 h1 r90
  text "UIM_OUT2-" at 56.433,13.2 h1 r90
  text "SS-" at 53.9,13.175 h1 r90
  text "INT3" at 64.075,13.175 h1 r90
  text "INT4" at 81.95,13.175 h1 r90
  text "INT6" at 84.525,13.175 h1 r90
  text "CLK-" at 51.35,13.15 h1 r90
  text "SR_STCP" at 79.379,13.144 h1 r90
  text "MPP" at 97.1,8.725 h3
  text "UIM_IN2" at 27.225,7.792 h1
  text "GND" at 74.325,4.175 h1 r90
  text "+5V" at 76.9,4.15 h1 r90
  text "SS+" at 53.9,3.775 h1 r90
  text "UIM" at 55.95,3.65 h1 r90
  text "INT2" at 64.075,3.35 h1 r90
  text "INT5" at 84.5,3.325 h1 r90
  text "OUT2+" at 57.1,2.925 h1.52 r90
  text "CLK+" at 51.525,2.775 h1 r90
  text "VOLT1" at 66.55,2.5 h1 r90
  text "SR_DS" at 82.008,2.275 h1 r90
  text "U6_TX" at 59.083,2.15 h1 r90
  text "VOLT5" at 71.825,2.125 h1 r90
  text "VOLT6" at 86.975,2.125 h1 r90
  text "VOLT3" at 69.225,2.1 h1 r90
  text "VOLT8" at 89.55,2.05 h1 r90
  text "MOSI+" at 46.375,2.025 h1 r90
  text "MISO+" at 48.95,2 h1 r90
  text "UIM_IN1" at 61.583,0.85 h1 r90
  text "SR_SHCP" at 79.383,0.3 h1 r90
Bottom Overlay:
  lines w0.2: 3.975,100 cw(c9.975,100) 9.975,106 ; 4.075,9.9 ccw(c10.075,9.9) 10.075,3.9 ; 4.975,100 cw(c9.975,100) 9.975,105 ; 5.075,9.9 ccw(c10.075,9.9) 10.075,4.9 ; 5.975,100 cw(c9.975,100) 9.975,104 ; 6.075,9.9 ccw(c10.075,9.9) 10.075,5.9 ; 129.925,104 cw(c129.925,100) 133.925,100 ; 129.925,105 cw(c129.925,100) 134.925,100 ; 129.925,106 cw(c129.925,100) 135.925,100 ; 130.025,4.125 ccw(c130.025,10.125) 136.025,10.125 ; 130.025,5.125 ccw(c130.025,10.125) 135.025,10.125 ; 130.025,6.125 ccw(c130.025,10.125) 134.025,10.125
  lines w0.25: 42.425,28.45 46.15,28.45 ; 42.425,30.175 40.7,30.175 44.8,26.075 52.625,26.075 50.262,28.437 ; 44,32.325 44,34.65 48.55,30.1 48.55,22.325 46.15,24.725 ; 46.125,28.475 48.537,26.062 ; 46.15,26.075 46.15,24.725 ; 46.15,28.475 46.15,32.356 ; 48.587,28.437 50.25,28.437 50.25,32.325 42.425,32.325 42.425,24.725 46.15,24.725 ; 48.6,24.375 50.3,24.375 50.3,26.05
  text "RZ" at 43.378,35.747 h4 r45
Mechanical 2:
  text "o" at 110.354,41.154 h1
  text "o" at 71.954,30.054 h1
  text "+" at 95.854,27.8 h1
  text "o" at 96.254,18.354 h1
  text "o" at 87.954,18.254 h1
  text "+" at 100.854,17.3 h1
  text "+" at 2.454,13 h1
  text "o" at 7.254,1.554 h1
  text "+" at 34.085,1.504 h1
  text "+" at -4.115,1.004 h1